# Altium PCB bldcDriverVer02.PcbDoc
Units mil, origin at the board's own origin, x right, y up, seen from the top; angles counter-clockwise.
Board outline 3346.46 x 3346.46 mil, 4 copper layers (Top Layer, Power Layer, Gnd Layer, Bottom Layer), stack 23.756 mil thick; 118 components, 64 nets, 350 pads, 111 vias.
Unrouted connection lines stored in the file: 2.
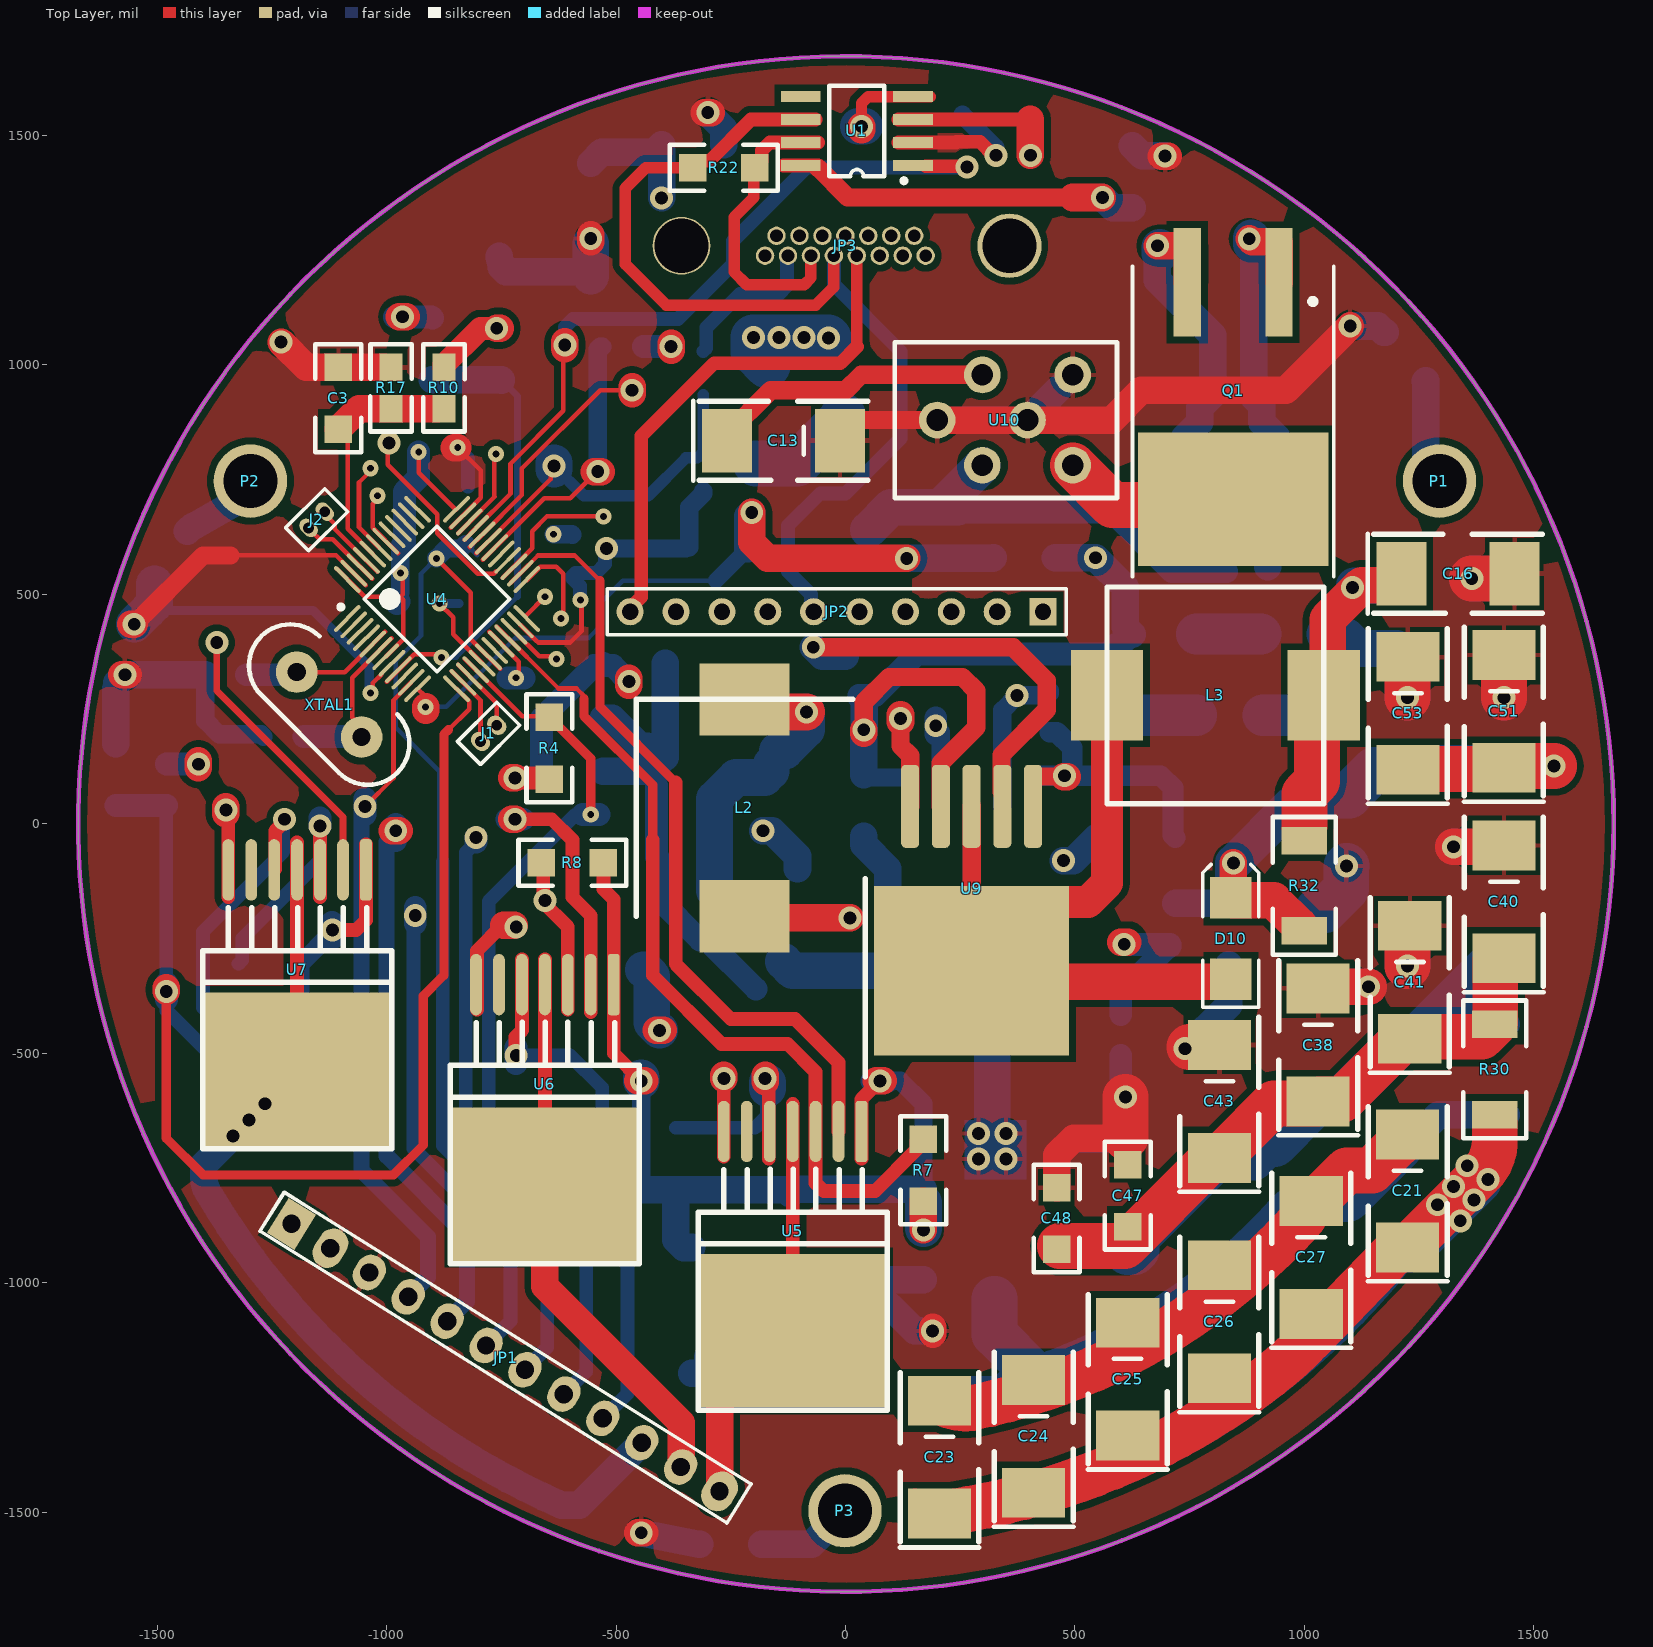
[diagram p0: Top Layer view]
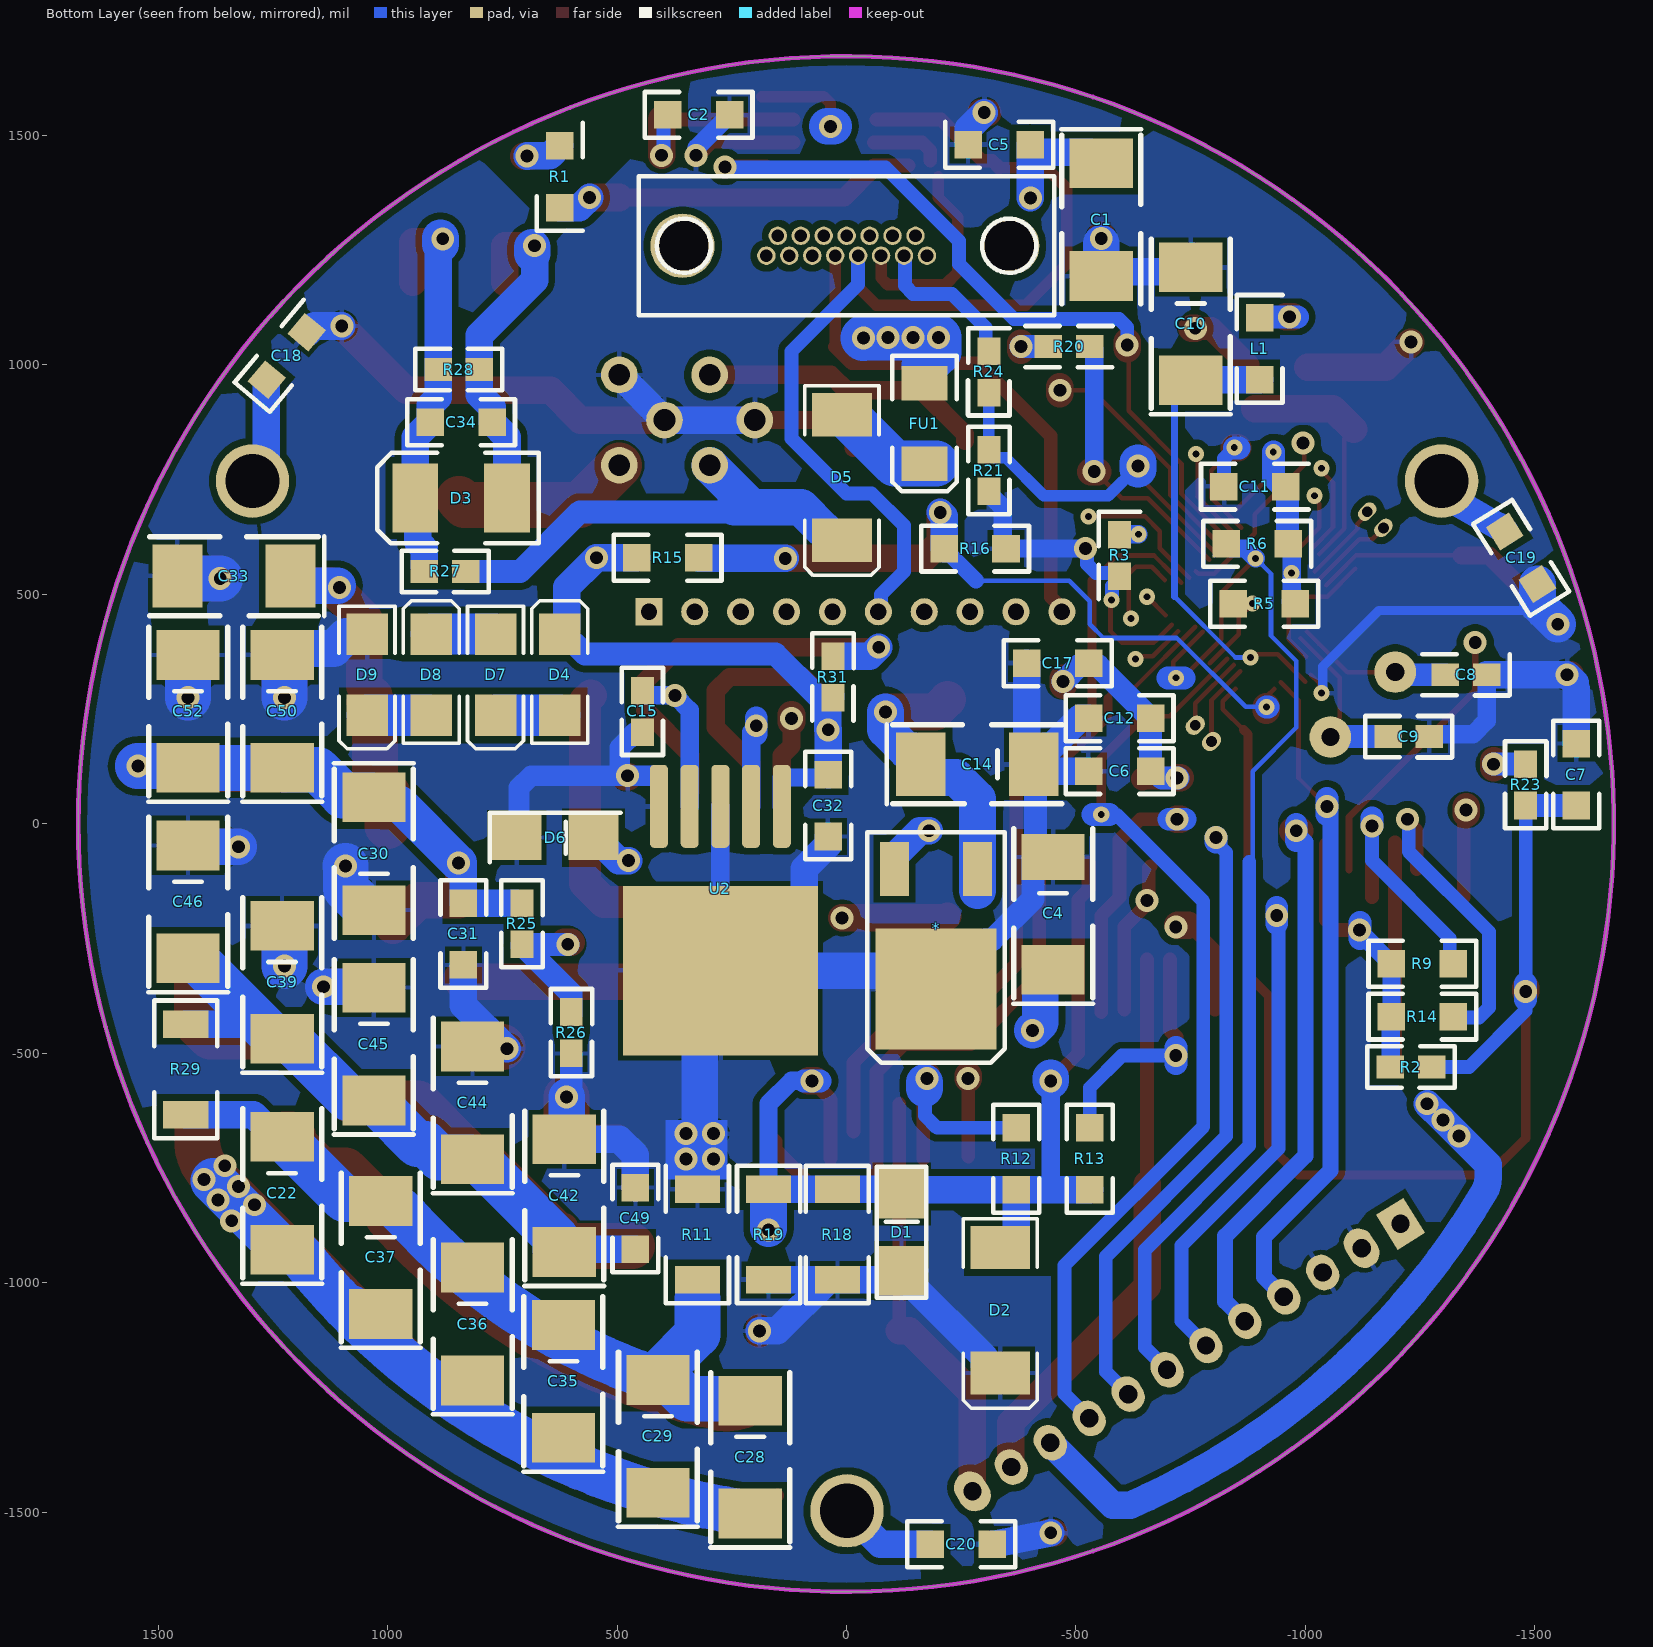
[diagram p1: Bottom Layer view, seen from below]
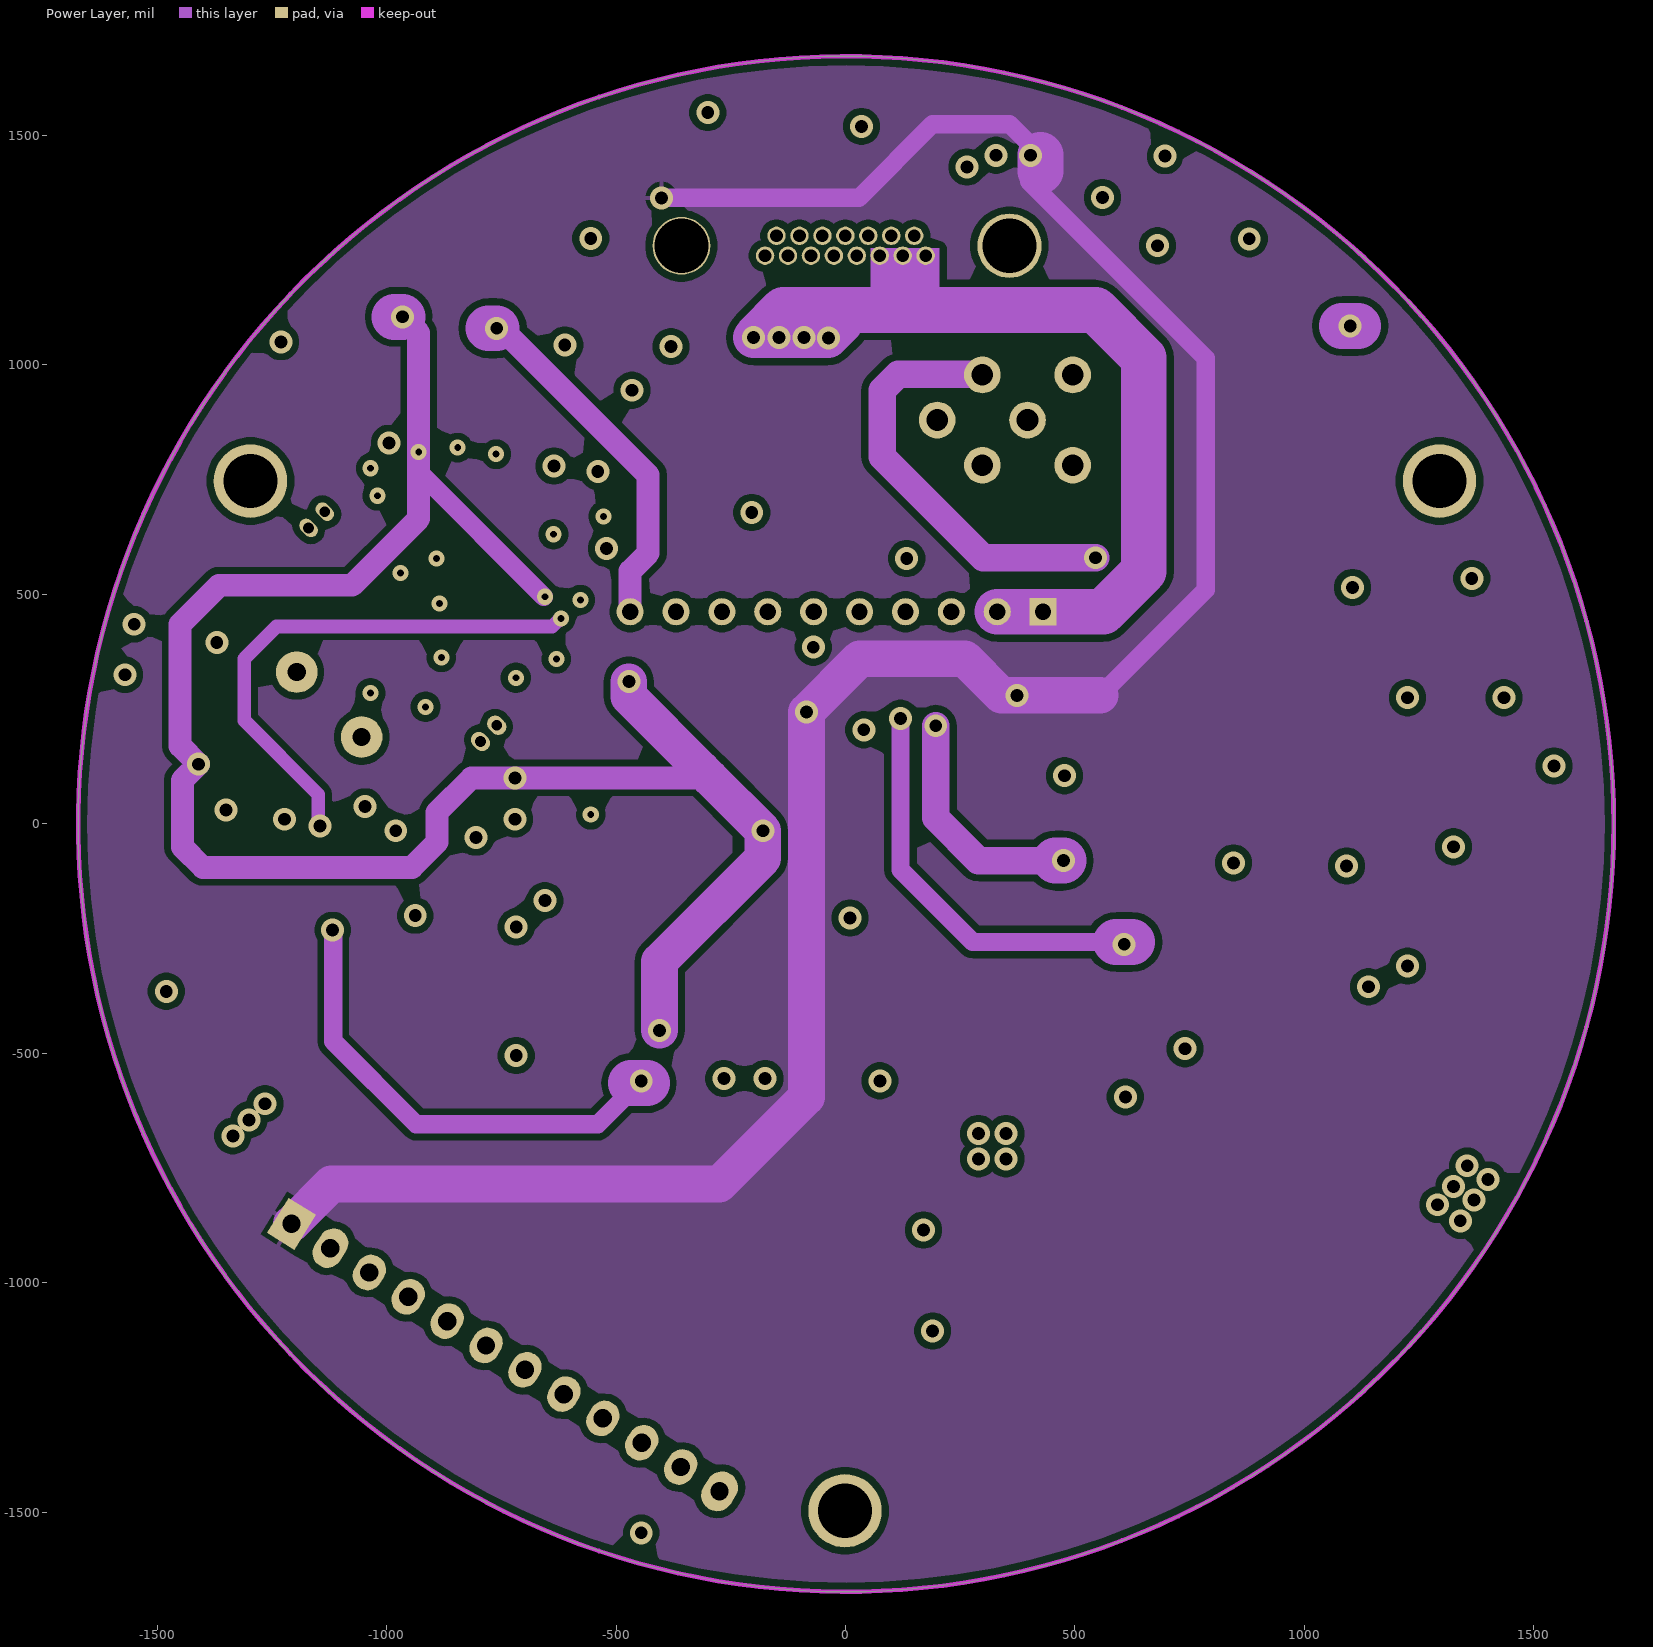
[diagram p2: Power Layer]
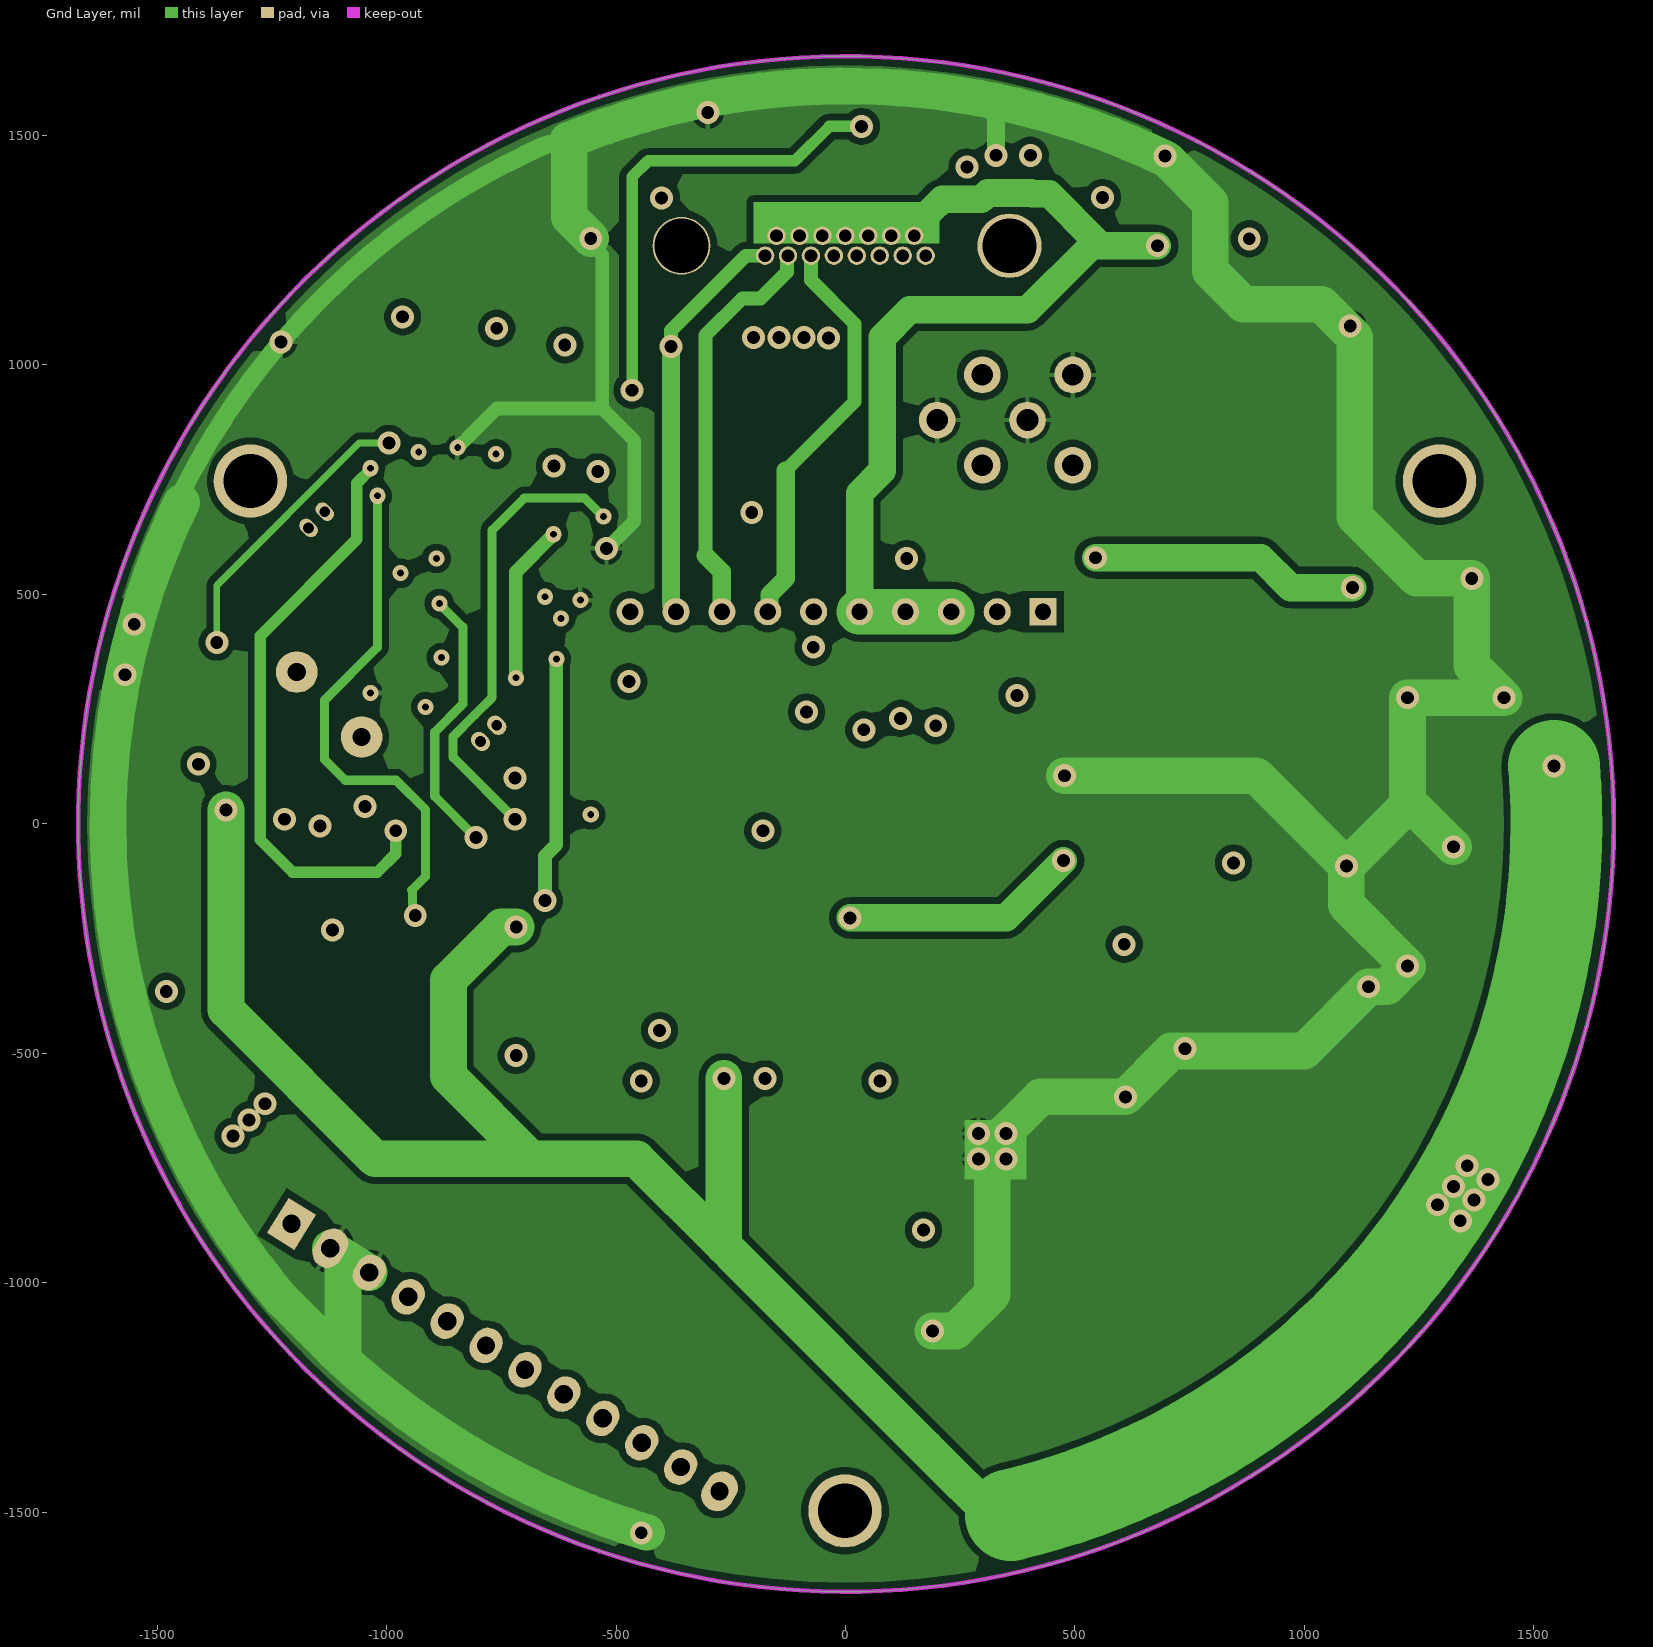
[diagram p3: Gnd Layer]

## Layer stack, top to bottom
Top Solder: solder mask 0.4, Solder Resist, Dk 3.5
Top Layer: signal copper 1.4
Dielectric 2: prepreg 2.8, PP-006, Dk 4.1
Power Layer: signal copper 1.378
Dielectric 1: dielectric 12.6, FR-4, Dk 4.8
Gnd Layer: signal copper 1.378
Dielectric 5: prepreg 2.8, PP-006, Dk 4.1
Bottom Layer: signal copper 1.4
Bottom Solder: solder mask 0.4, Solder Resist, Dk 3.5

## Board outline
-1672.01,-0.29 ccw(c1.22,-0.29) 1.22,-1673.52 ccw(c1.22,-0.29) 1674.45,-0.29 ccw(c1.22,-0.29) 1.22,1672.94 ccw(c1.22,-0.29)

## Design rules (kind name [scope] priority, off if disabled: settings)
Clearance Clearance_1 [All] p1: gap=15 ignorepadtopadclearanceinfootprint=TRUE
HoleSize [All] p1: absolutevalues=TRUE maxlimit=200 minlimit=1 maxpercent=80.000 minpercent=20.000
PolygonConnect [All] p1: connectstyle=Relief reliefconductorwidth=10 reliefentries=4 polygonreliefangle="90 Angle" airgapwidth=10
RoutingVias [All] p1: holewidth=28 width=50 viastyle="Through Hole" minholewidth=10 minwidth=20 maxholewidth=28 maxwidth=50
SolderMaskExpansion [All] p1: expansion=4 istentingtop=FALSE
Width [All] p1: maxlimit=200 minlimit=10 preferedwidth=100 toplayer_maxwidth=100 toplayer_prefwidth=30 midlayer1_prefwidth=60 bottomlayer_maxwidth=100 bottomlayer_prefwidth=30 minimp=50.000000 maximp=50.000000 favimp=50.000000
29 further rules are at their usual default settings.

## Classes and differential pairs
net class motor[3..1]: motor1 motor2 motor3
net class cntBridge[7..1]: cntBridge1 cntBridge2 cntBridge3 cntBridge4 cntBridge5 cntBridge6 cntBridge7
component class U_Supply: C13 C14 C15 C16 C18 C19 C20 C34 D3 D4 D5 D6 D7 D8 D9 FU1 L2 P1 P2 P3 Q1 R15 R16 R27 R28 U2 U10
component class U_FBridge: C21 C22 C23 C24 C25 C26 C27 C28 C29 C35 C36 C37 C38 C39 C40 C41 C42 C43 C44 C45 C46 C47 C48 C49 D1 D2 R7 R8 R9 R11 R12 R13 R14 R18 R19 R29 R30 U5 U6 U7
component class U_Control: * C3 C4 C5 C6 C7 C8 C9 C10 C11 C12 C17 J1 J2 L1 R2 R3 R4 R5 R6 R10 R17 R20 R21 R23 R24 U4 XTAL1
component class U_Communication: C1 C2 R1 R22 U1
component class Designator: C30 C31 C32 C33 C50 C51 C52 C53 D10 L3 R25 R26 R31 R32 U9
component class BLDC_Schem: JP1 JP2 JP3

## Components (designator, comment, footprint, x,y, rotation, side; value= is the part's Value field where it differs from the comment)
* "LF33" Dpak -345,-18 r0 bottom
C1 "100u_Tantalium" Tantalum_9545#1 -555,1316.97 r270 bottom
C2 "1u" 1206_SMD 322.5,1545 r180 bottom
C3 "1u" 1206_SMD -1105,927.5 r90 top
C4 "100u_Tantalium" Tantalum_9545#2 -450,-195 r90 bottom
C5 "1u" 1206_SMD -332.5,1480 r0 bottom
C6 "1u" 1206_SMD -595,115 r0 bottom
C7 "1u" 1206_SMD -1590,107.5 r90 bottom
C8 "22p" 0805 -1305,325 r180 bottom
C9 "22p" 0805 -1180,190 r180 bottom
C10 "10u_Tantalium" Tantalum_9545#1 -750,1090 r90 bottom
C11 "1u" 1206_SMD -890,735 r0 bottom
C12 "1u" 1206_SMD -595,230 r0 bottom
C13 "10u_Tantalium_35" Tantalum_9545#1 -135,835 r0 top
C14 "100u_Tantalium" Tantalum_9545#1 -285,130 r180 bottom
C15 "1u" 0805 445,290 r270 bottom
C16 "10u_Tantalium_35" Tantalum_9545#1 1335,545 r0 top
C17 "1u" 1206_SMD -460,350 r0 bottom
C18 "100nF" 1206_SMD 1220,1020 r130 bottom
C19 "100nF" 1206_SMD -1470,580 r238 bottom
C20 "100nF" 1206_SMD -250,-1570 r180 bottom
C21 "Cap" Tantalum_9545#1 1225,-800 r90 top value=160uF
C22 "Cap" Tantalum_9545#1 1230,-805 r90 bottom value=160uF
C23 "Cap" Tantalum_9545#1 205,-1380 r90 top value=160uF
C24 "Cap" Tantalum_9545#1 410,-1335 r90 top value=160uF
C25 "Cap" Tantalum_9545#1 615,-1210 r90 top value=160uF
C26 "Cap" Tantalum_9545#1 815,-1085 r90 top value=160uF
C27 "Cap" Tantalum_9545#1 1015,-945 r90 top value=160uF
C28 "Cap" Tantalum_9545#1 210,-1380 r90 bottom value=160uF
C29 "Cap" Tantalum_9545#1 411,-1335 r90 bottom value=160uF
C30 "Cap Pol1" Tantalum_9545#1 1030,-65 r270 bottom value=50uF
C31 "Cap Pol1" 1206_SMD 835,-240 r270 bottom value=100nf
C32 "Cap Pol1" 1206_SMD 40,40 r270 bottom value=100nF
C33 "Cap Pol1" Tantalum_9545#1 1335,540 r0 bottom value=50uF
C34 "Cap" 1206_SMD 840,875 r0 bottom value=100nF
C35 "Cap" Tantalum_9545#1 617,-1215 r90 bottom value=160uF
C36 "Cap" Tantalum_9545#1 815,-1090 r90 bottom value=160uF
C37 "Cap" Tantalum_9545#1 1015,-945 r90 bottom value=160uF
C38 "Cap" Tantalum_9545#1 1030,-481.97 r90 top value=160uF
C39 "Cap" Tantalum_9545#1 1230,-345 r90 bottom value=160uF
C40 "Cap" Tantalum_9545#1 1435,-170 r90 top value=160uF
C41 "Cap" Tantalum_9545#1 1230,-345 r90 top value=160uF
C42 "Cap" Tantalum_9545#1 615,-810 r90 bottom value=160uF
C43 "Cap" Tantalum_9545#1 815,-605 r90 top value=160uF
C44 "Cap" Tantalum_9545#1 815,-608.03 r90 bottom value=160uF
C45 "Cap" Tantalum_9545#1 1030,-480 r90 bottom value=160uF
C46 "Cap" Tantalum_9545#1 1435,-170 r90 bottom value=160uF
C47 "Cap" 1206_SMD 615,-810 r270 top value=100nF
C48 "Cap" 1206_SMD 460,-860 r270 top value=100nF
C49 "Cap" 1206_SMD 460,-860 r270 bottom value=100nF
C50 "Cap Pol1" Tantalum_9545#1 1230,245 r90 bottom value=50uF
C51 "Cap Pol1" Tantalum_9545#1 1435,245 r90 top value=50uF
C52 "Cap Pol1" Tantalum_9545#1 1435,245 r90 bottom value=50uF
C53 "Cap Pol1" Tantalum_9545#1 1225.87,240.87 r90 top value=50uF
D1 "SS34" SMA -120,-890 r270 bottom
D2 "S3M" SMC -335,-1060 r270 bottom
D3 "5.1v" "diode zener_smd" 840,710 r0 bottom
D4 "SMBJ9.0A" SMB 625,325 r90 bottom
D5 "SS34" SMC 10,755 r270 bottom
D6 "SS110" SMA 635,-30 r0 bottom
D7 "SMBJ9.0A" SMB 765,325 r270 bottom
D8 "SMBJ9.0A" SMB 905,325 r90 bottom
D9 "SMBJ9.0A" SMB 1045,325 r270 bottom
D10 "5822B" SMB 840,-250 r90 top
FU1 "2A" 7227 -170,960 r270 bottom
J1 "ExA" MHDR1X2#1 -795.36,179.64 r45 top
J2 "ExD" MHDR1X2#2 -1134.64,680.36 r225 top
JP1 "Motor and Sensors" HDR1X12 -1207.21,-871.72 r328 top
JP2 "Power and Com" HDR1X10 430.79,462.28 r180 top
JP3 "Micro_D15" Micro_D -0.21,1259.93 r0 top locked
L1 "10uH" 1206_SMD -900,1035 r270 bottom
L2 "330uH" inductor_12.3*12.3 -220,35 r270 top
L3 "Inductor" inductor_12.3*12.3 806.22,280 r180 top value=33uh
P1 "head1" PAD 1294.62,747.08 r0 top
P2 "head1" PAD -1296.64,747.08 r0 top
P3 "head1" PAD -1.01,-1497.02 r0 top
Q1 "IRF3710SPBF" D2PAK 945,1180 r180 top
R1 "1k" 1206_SMD 625,1410 r270 bottom
R2 "1k" 0805 -1185,-530 r180 bottom
R3 "3.3k" 0805 -595,540 r90 bottom
R4 "1.2k" 1206_SMD -645,165 r270 top
R5 "1.2k" 1206_SMD -910,480 r180 bottom
R6 "1.2k" 1206_SMD -895,610 r180 bottom
R7 "4.7k" 1206_SMD 170,-755 r270 top
R8 "4.7k" 1206_SMD -595,-85 r0 top
R9 "4.7k" 1206_SMD -1255,-305 r0 bottom
R10 "10k" 0805 -875,905 r90 top
R11 "Res1" 2010_smd 325,-895 r270 bottom value=0ohm
R12 "680" 1206_SMD -370,-730 r270 bottom
R13 "680" 1206_SMD -530,-730 r270 bottom
R14 "680" 1206_SMD -1255,-420 r0 bottom
R15 "15k" 1206_SMD 390,580 r0 bottom
R16 "1.2k" 1206_SMD -280,600 r0 bottom
R17 "1.2k" 0805 -990,995 r270 top
R18 "0.33" 2010_smd 20,-895 r90 bottom
R19 "0.33" 2010_smd 170,-895 r90 bottom
R20 "820" 0805 -440,1040 r180 bottom
R21 "3.3k" 0805 -310,725 r90 bottom
R22 "680" 1206_SMD -265,1430 r0 top
R23 "180k" 0805 -1480,40 r90 bottom
R24 "820" 0805 -310,1030 r270 bottom
R25 "Res1" 0805_smd 707.42,-217.7 r90 bottom value=1K
R26 "Res1" 0805_smd 600,-455 r90 bottom value=1K
R27 "Res1" 0805_smd 875,550 r180 bottom value=1K
R28 "Res1" 0805 800,990 r0 bottom value=1K
R29 "Res1" 2010_smd 1440,-535 r270 bottom value=0ohm
R30 "Res1" 2010_smd 1415,-535 r90 top value=0ohm
R31 "10K" 0805_smd 30,320 r90 bottom
R32 "0" 2010_smd 1000,-135 r270 top
U1 "MCP2551" SOIC8 25,1510 r90 top
U2 "LM2576_5v" TO263-5L#1 275,-140.87 r270 bottom
U4 "STM32F103_CBT" LQFP48 -890,490 r45 top
U5 "BTN8980" TO263_7 -115,-887.67 r270 top
U6 "BTN8980" TO263_7 -655,-567.67 r270 top
U7 "BTN8980" TO263_7 -1195,-317.67 r270 top
U9 "XL6009" TO263-5L#2 275,-140.87 r270 top
U10 "BNX002-1" BNX002-1 396.85,880 r180 top
XTAL1 "8M" xtal -1125,260 r135 top

## Footprints (in the part's own frame and the unit in brackets; to place one, negate y for a bottom-side part, rotate by r counter-clockwise, add the part's x,y. Pads: shape width x height; smd on the part's side, far side on the other; paste and mask are expansions set on the pad)
0805 [mil]
  rect 60x50 smd: 1(0,0) 2(90,0)
  silkscreen extent -50,-45 140,45
0805_smd [mil]
  rect 60x50 smd: 1(-45,0) 2(45,0)
  silkscreen extent -95,-45 95,45, body extent -57,-28 61,27, height 21
1206_SMD [mil]
  rect 60x60 smd: 1(-67.5,0) 2(67.5,0)
  silkscreen extent -117,-50 118,50, body extent -66,-34 66,34, height 33
2010_smd [mm]
  rect 1.524x2.5 smd: 1(-2.5,0) 2(2.5,0)
  silkscreen extent -3.81,-1.75 3.81,1.75, body extent -2.5,-1.25 2.5,1.25, height 0.6
7227 [mil]
  rect 75x100 smd: 1(0,0) 2(175,0)
  silkscreen extent -60,-70 235,70
BNX002-1 [mm]
  round 2.032 hole 1.2: 1(2.5,-2.5) 2(2.5,2.5) 3(-2.5,-2.5) 4(-2.5,2.5) 5(0,0) 6(5,0)
  silkscreen extent -4.95,-4.31 7.35,4.31
D2PAK [mm]
  rect 1.5x6 smd: 1(0,0) 3(5.08,0)
  rect 10.55x7.4 smd: 2(2.54,12)
  silkscreen extent -3.04,-0.9 8.12,16.3, body extent -2.54,-0.84 7.62,14.42, height 4.88
"diode zener_smd" [mil] "D?"
  rect 100x150 smd: A(-100,0) K(100,0)
  silkscreen extent -169,-98 183,98, body extent -112,-69 125,69, height 39
Dpak [mm]
  rect 1.6x3 smd: 1(1.51,2.037) 3(6.11,2.037)
  rect 6.7x6.7 smd: 2(3.81,8.687)
  silkscreen extent 0,0 7.62,12.78, body extent 0.49,1.71 7.03,11.65, height 2.41
HDR1X10 [mm] "Connector; Header; 10 Position"
  rect 1.5x1.5 hole 0.9: 1(0,0)
  round 1.5 hole 0.9: 2(2.54,0) 3(5.08,0) 4(7.62,0) 5(10.16,0) 6(12.7,0) 7(15.24,0) 8(17.78,0) 9(20.32,0) 10(22.86,0)
  silkscreen extent -1.27,-1.27 24.13,1.27
HDR1X12 [mil] "Connector; Header; 12 Position"
  rect 70x90 hole 40: 1(0,0)
  oval 65x90 hole 40: 2(100,0)
  oval 65x80 hole 40: 3(200,0) 4(300,0) 5(400,0) 6(500,0) 7(600,0) 8(700,0) 9(800,0) 10(900,0) 11(1000,0)
  oval 70x90 hole 40: 12(1100,0)
  silkscreen extent -50,-50 1150,50
inductor_12.3*12.3 [mm]
  rect 4x5 smd: 1(-6,0) 2(6,0)
  silkscreen extent -6,-6 6,6
LQFP48 [mm] "TSQFP, 48-Leads, Body 9.0x9.0mm (max), Pitch 0.50mm, IPC Medium Density"
  oval 2x0.22 smd: 1(-4.275,2.75) 2(-4.275,2.25) 3(-4.275,1.75) 4(-4.275,1.25) 5(-4.275,0.75) 6(-4.275,0.25) 7(-4.275,-0.25) 8(-4.275,-0.75) 9(-4.275,-1.25) 10(-4.275,-1.75) 11(-4.275,-2.25) 12(-4.275,-2.75) 25(4.275,-2.75) 26(4.275,-2.25) 27(4.275,-1.75) 28(4.275,-1.25) 29(4.275,-0.75) 30(4.275,-0.25) 31(4.275,0.25) 32(4.275,0.75) 33(4.275,1.25) 34(4.275,1.75) 35(4.275,2.25) 36(4.275,2.75)
  oval 0.22x2 smd: 13(-2.75,-4.275) 14(-2.25,-4.275) 15(-1.75,-4.275) 16(-1.25,-4.275) 17(-0.75,-4.275) 18(-0.25,-4.275) 19(0.25,-4.275) 20(0.75,-4.275) 21(1.25,-4.275) 22(1.75,-4.275) 23(2.25,-4.275) 24(2.75,-4.275) 37(2.75,4.275) 38(2.25,4.275) 39(1.75,4.275) 40(1.25,4.275) 41(0.75,4.275) 42(0.25,4.275) 43(-0.25,4.275) 44(-0.75,4.275) 45(-1.25,4.275) 46(-1.75,4.275) 47(-2.25,4.275) 48(-2.75,4.275)
  silkscreen extent -4.2,-2.85 2.85,3.57, body extent -3.5,-3.5 3.5,3.5, height 1.6
MHDR1X2#1 [mil] "Connector; Header; 2 Position"
  oval 35x45 hole 23.62: 1(0,0) 2(50,0)
  silkscreen extent -35,-35 85,35
MHDR1X2#2 [mil] "Connector; Header; 2 Position"
  oval 30x45 hole 23.62: 1(0,0) 2(50,0)
  silkscreen extent -35,-35 85,35
Micro_D [mm]
  round 1.02 hole 0.7: 1(-4.445,-0.55) 2(-3.175,-0.55) 3(-1.905,-0.55) 4(-0.635,-0.55) 5(0.635,-0.55) 6(1.905,-0.55) 7(3.175,-0.55) 8(4.445,-0.55) 9(-3.81,0.55) 10(-2.54,0.55) 11(-1.27,0.55) 12(0,0.55) 13(1.27,0.55) 14(2.54,0.55) 15(3.81,0.55)
PAD [mil]
  round 160 hole 118.11: 1(0,0)
SMA [mm]
  rect 2.75x2.5 smd: A(2.125,0) K(-2.125,0)
  silkscreen extent -3.62,-1.37 3.62,1.37
SMB [mm] "DO-214-AA/SMB; 2 C-Bend Leads; Body 5.3 x 3.6 mm, inc. leads (LxW)"
  rect 2.3x2.3 smd: 1(-2.25,0) 2(2.25,0)
  silkscreen extent -3.8,-1.55 4.1,1.55
SMC [mm] "DO-214-AB/SMC; 2 C-Bend Leads; Body 7.9 x 5.9 mm, inc. leads (LxW)"
  rect 2.4x3.3 smd: 1(-3.475,0) 2(3.475,0)
  silkscreen extent -5.07,-2.05 5.43,2.05
SOIC8 [mm] "Small Outline; 8 Leads; Body Width 3.9 mm; Pitch 1.27 mm"
  rect 0.6x2.2 smd: 1(-1.905,-3.108) 2(-0.635,-3.108) 3(0.635,-3.108) 4(1.905,-3.108) 5(1.905,3.108) 6(0.635,3.108) 7(-0.635,3.108) 8(-1.905,3.108)
  silkscreen extent -2.88,-2.72 2.5,1.52, body extent -2.5,-3.1 2.5,3.1, height 1.75
Tantalum_9545#1 [mm]
  rect 2.75x3.5 smd: 1(-3.125,0) 2(3.125,0)
  silkscreen extent -5,-2.21 4.67,2.21
Tantalum_9545#2 [mm]
  rect 2.75x3.5 smd: 1(-3.125,0)
  rect 2.54x3.5 smd: 2(3.125,0)
  silkscreen extent -5,-2.21 4.67,2.21
TO263-5L#1 [mm]
  rrect50% 4.6x1 smd: 1(-4.55,3.4) 2(-4.55,1.7) 3(-4.55,0) 4(-4.55,-1.7) 5(-4.55,-3.4)
  rect 9.4x10.8 smd: 6(4.55,0)
TO263-5L#2 [mm]
  rrect50% 4.6x1 smd: 1(-4.55,3.4) 2(-4.55,1.7) 3(-4.55,0) 4(-4.55,-1.7) 5(-4.55,-3.4)
  rect 9.4x10.8 smd: 3(4.55,0)
  silkscreen extent -0.55,-5.9 10.42,-5.9
TO263_7 [mm]
  rrect50% 3.4x0.65 smd: 1(-5.52,3.81)
  oval 3.4x0.65 smd: 2(-5.52,2.54) 3(-5.52,1.27) 4(-5.52,0) 5(-5.52,-1.27) 6(-5.52,-2.54) 7(-5.52,-3.81)
  rect 8.5x10.4 smd mask+0.076: 8(5.52,0)
  silkscreen extent -3.44,-5.23 9.92,5.23
xtal [mm]
  round 2.3 hole 1: 1(2.54,0) 2(-2.54,0)
  silkscreen extent -5.33,-2.29 5.33,2.29

## Part data
C1 C4 C10 C13 C14 C16 C18 C19 C20: library part CAP_ELECTRO
C2 C3 C5 C6 C7 C8 C9 C11 C12 C15 C17: library part CAP, "Capacitor"
C21 C22 C23 C24 C25 C26 C27 C28 C29 C34 C35 C36 C37 C38 C39 C40 C41 C42 C43 C44 C45 C46 C47 C48 C49: "Capacitor", LatestRevisionDate=17-Jul-2002, LatestRevisionNote="Re-released for DXP Platform.", PackageDescription="Radial Cap, Thru-Hole; 2 Leads; 0.3 in Pin Spacing", PackageReference=RAD-0.3, Published=8-Jun-2000, Publisher="Altium Limited"
C30 C31 C32 C33 C50 C51 C52 C53: "Polarized Capacitor (Radial)", LatestRevisionDate=17-Jul-2002, LatestRevisionNote="Re-released for DXP Platform.", PackageDescription="Polarized Capacitor (Radial); 2 Leads", PackageReference=RB7.6-15, Published=8-Jun-2000, Publisher="Altium Limited"
D1 D2: library part DIODE
D3: library part "D Zener", "Zener Diode", LatestRevisionDate=17-Jul-2002, LatestRevisionNote="Re-released for DXP Platform.", PackageDescription="Diode, Thru-Hole; 2 Leads; 0.7 in Pin Spacing", PackageReference=DIODE-0.7, Published=8-Jun-2000, Publisher="Altium Limited"
D4 D7 D8 D9: library part ZENER
D5 D6: library part DIODE_SCH
D10: library part Diode, "Default Diode", Code_JEDEC=DO-214-AB, LatestRevisionDate=17-Jul-2002, LatestRevisionNote="Re-released for DXP Platform.", PackageDescription="DO-214-AB/SMC; 2 C-Bend Leads; Body 7.9 x 5.9 mm, inc. leads (LxW)", PackageReference=SMC, PackageVersion=Sep-1996, Published=8-Jun-2000, Publisher="Altium Limited"
FU1: library part FUSE2, "Fuse"
J1 J2: library part "HEADER 2"
JP1: library part "HEADER 12"
JP2: library part "HEADER 10"
JP3: library part "HEADER 15"
L1 L2: library part INDUCTOR
Q1: library part NMOS-2, "N-Channel Power MOSFET", ComponentLink1Description="Manufacturer Link", ComponentLink1URL=http://www.irf.com/, DatasheetVersion=PD-9.814, LatestRevisionDate=17-Jul-2002, LatestRevisionNote="Re-released for DXP Platform.", Note="Pin 2 is electrically connected to pin 4.", PackageDescription="TO, Thru-Hole, Vertical, Heatsink Mounted; 3 In-Line Leads; Pitch 2.54 mm", PackageReference=TO-220AB, PackageVersion=Feb-1997, Published=8-Jun-2000, Publisher="Altium Limited"
R1 R2 R3 R4 R5 R6 R7 R8 R9 R10 R12 R13 R14 R15 R16 R17 R18 R19 R20 R21 R22 R23 R24: library part RES2
R11 R25 R26 R27 R28 R29 R30: "Resistor", LatestRevisionDate=17-Jul-2002, LatestRevisionNote="Re-released for DXP Platform.", PackageDescription="Axial Device, Thru-Hole; 2 Leads; 0.3 in Pin Spacing", PackageReference=AXIAL-0.3, Published=8-Jun-2000, Publisher="Altium Limited"
R31 R32: library part Res1, "Resistor", LatestRevisionDate=17-Jul-2002, LatestRevisionNote="Re-released for DXP Platform.", PackageDescription="Axial Device, Thru-Hole; 2 Leads; 0.3 in Pin Spacing", PackageReference=AXIAL-0.3, Published=8-Jun-2000, Publisher="Altium Limited"
U1: library part CAN_Interface
U4: "ST Microcontroller"
U9: "Voltage Booster"
U10: "EMI FILTERS"
XTAL1: library part CRYSTAL, "Crystal"
L3: Code_IEC=1005, Code_JEITA=0402, LatestRevisionDate=29-May-2009, LatestRevisionNote="IPC-7351 Footprint Added.", PackageDescription="Chip Inductor", PackageReference=0402-A, Published=8-Jun-2000, Publisher="Altium Limited"

## Free pads (board coordinates)
  round 125.98 hole 118.11: 0(-357.47,1259.84)
  round 140 hole 118.11: 0(357.49,1259.84)

## Via types
v1: diameter 50, hole 28, Top Layer to Bottom Layer, 92 vias
v2: diameter 35, hole 15, Top Layer to Bottom Layer, 19 vias

## Nets (pads, with @x,y where several pads share a name; then routed paths per layer and width w, separated by ;. In a path a pad name is that pad's centre, name@x,y a point inside that pad or via, vN(x,y) a via of type N, cw(c..) or ccw(c..) an arc to the next point about the centre after c; other vN are vias at no path point)
BodyGnd1: C18.1 P1.1 | length 232.1
  Bottom Layer w60: C18.1@1264.45,965.82 1263.39,964.76 1265,963.14 1265,776.7 P1.1
BodyGnd2: C19.1 P2.1 | length 182.9
  Bottom Layer w60: C19.1 -1434.17,637.45 -1431.8,639.82 -1426.09,645.53 -1419.08,649.53 -1318.02,707.1 -1312.31,712.81 -1303.67,721.45 -1302.5,725.71 P2.1
BodyGnd3: C20.1 P3.1 | length 211.7
  Bottom Layer w60: C20.1 -73.99,-1570 P3.1
cntBridge1: U4.26 U5.2 | length 1739.9
  Top Layer w10: U4.26@-729.66,525.07 U4.26 -669.91,584.82 -589.82,584.82 -535,530
  Top Layer w20: -535,530 -535,255 -370,90
  Top Layer w30: -370,90 -370,-305 -250,-425 -110,-425 -15,-520 U5.2
cntBridge2: U4.27 U6.2 | length 1884
  Top Layer w10: U4.27@-746.76,536.76 -682.5,601.01 -682.5,637.85 -650.35,670 -527.18,670 v2(-526.96,670.22)
  Top Layer w30: v1(-720,10) -640,10 -595,-35 -595,-160 -555,-200 U6.2 U6.2@-555,-410
  Top Layer w60: v1@-727.5,10 v1(-720,10)
  Gnd Layer w20: v1(-720,10) -855,145 -855,190 -853.19,191.81 -853.19,192.07 -807.78,237.48 -770,275.27 -770,640 -700,710 -568.49,710 -528.71,670.22 v2(-526.96,670.22)
  Bottom Layer w50: v1@-737.5,10 v1(-720,10) v1@-702.5,10
cntBridge3: U4.28 U7.2 | length 1647.7
  Top Layer w10: v1(-995,830) -997.5,827.5 -997.5,782.5 -889.65,674.65 -889.65,633.04 -801.61,545 -766.35,545 U4.28@-760.97,550.38
  Top Layer w15: v1(-1370,395) -1370,290 -1095,15 U7.2
  Gnd Layer w15: v1(-1370,395) -1370,520 -1060,830 v1(-995,830)
cntBridge4: R7.1 U4.21 U5.3 | length 1913.6
  Top Layer w10: U4.21@-760.2,429.8 -625.4,295 -586,295 -566.9,275.9 -570,272.8
  Top Layer w20: -570,272.8 -570,235 -420,85 -420,-35
  Top Layer w30: -420,-35 -420,-330 -270,-480 -125.71,-480 -65,-540.71 U5.3 -65,-782.43 -47.43,-800 65,-800 155,-710 155,-692.5 R7.1@170,-677.5
cntBridge5: R8.1 U4.22 U6.3 | length 1001.2
  Top Layer w10: U4.22 -667.5,364.94 -635.24,364.94 v2(-630,359.7)
  Top Layer w15: R8.1@-662.5,-92.5 R8.1
  Top Layer w30: v1@-662.5,-167.5 -605,-225 U6.3 U6.3@-605,-405 ; R8.1@-662.5,-92.5 -658.75,-96.25 -658.75,-163.53 v1(-655,-167.28)
  Gnd Layer w30: v1(-655,-167.28) -655,-70 -630,-45 v2(-630,359.7)
cntBridge6: R9.1 U4.25 U7.3 | length 1901.5
  Top Layer w10: U4.25@-693.49,531.51 -665,560 -630,560 -615.22,545.22 -615.22,452.28 v2(-620,447.5)
  Top Layer w30: U7.3@-1145,-160 U7.3 v1(-1145,-5)
  Power Layer w30: v1(-1145,-5) -1148.83,-1.17 -1148.83,63.83 -1310,225 -1310,360 -1240,430 -638.85,430 -621.35,447.5 v2(-620,447.5)
  Bottom Layer w30: R9.1 -1314.43,-296.93 -1314.43,-249.43 -1145,-80 v1(-1145,-5)
  Bottom Layer w50: v1(-1145,-5) v1@-1145,12.5
cntBridge7: D1.K D2.1 R2.1 R7.2 R8.2 R9.2 R12.2 R13.2 R14.2 R18.2 R19.2 U5.1 U6.1 U7.1 | length 4041.5
  Top Layer w30: v1(-1117.5,-231.17) -1066.17,-231.17 -1045,-210 U7.1 U7.1@-1045,-45 ; R8.2 -527.5,-142.5 -505,-165 U6.1 -505,-500 v1(-445,-560) ; U5.1@35,-730 U5.1 35,-600 v1(75,-560)
  Top Layer w60: v1@-452.5,-560 v1(-445,-560) v1@-437.5,-560 ; v1@67.5,-560 v1(75,-560) v1@82.5,-560 ; v1(170,-885) R7.2
  Power Layer w40: v1(-1117.5,-231.17) -1116.17,-232.5 -1116.17,-473.83 -935,-655 -540,-655 -450,-565 v1(-445,-560)
  Power Layer w100: v1@-467.5,-565 -450,-565 v1@-432.5,-565
  Bottom Layer w40: R2.1 -1186.25,-528.75 -1186.25,-421.25 R14.2 R9.2 -1119.41,-236.91 -1119.41,-233.09 v1(-1117.5,-231.17) ; -452.5,-797.5 -445,-790 -445,-566.91 v1(-445,-560) ; v1(75,-560) 120,-560 170,-610 R19.2 170,-881.91 v1(170,-885)
  Bottom Layer w50: v1@-1118.46,-249.63 v1@-1118.46,-214.63 ; v1@57.5,-560 v1@92.5,-560
  Bottom Layer w60: R13.2 -452.5,-797.5 R12.2@-375,-797.5 ; D2.1 -352.72,-923.19 -369.96,-905.94 R12.2 R12.2 -128.84,-797.5 D1.K ; D1.K@-120,-796.57 R18.2 R19.2
  Bottom Layer w80: v1(-445,-560) v1@-445,-553.09 ; v1@170,-881.91 R19.2@170,-825
GND: *.2 C1.2 C2.2 C3.2 C4.2 C5.2 C6.2 C7.2 C8.2 C9.2 C10.2 C11.2 C12.2 C13.2 C14.2 C15.2 C16.2 C17.2 C18.2 C19.2 C20.2 C30.2 C31.2 C32.2 C33.2 C38.2 C39.2 C40.2 C41.2 C42.2 C43.2 C44.2 C45.2 C46.2 C47.1 C48.1 C49.1 C50.2 C51.2 C52.2 C53.2 D1.A D2.2 D6.A D9.1 JP1.2 JP1.3 R1.1 R3.1 R11.1 R16.1 R17.1 R18.1 R19.1 R21.1 R26.1 U1.2 U2.3 U2.5 U2.6 U4.8 U4.23 U4.35 U4.47 U9.1 U10.3 U10.5 U10.6 | length 24595.7
  Top Layer w10: -1340,585 -1110.27,585 U4.47 ; U4.47@-1071.51,546.51 U4.47@-1045,520 ; v2(-1035,285) -1030.22,289.78 -1030.22,307.08 U4.8@-1011.96,325.33 ; U4.35@-860.14,645.14 U4.35 -795,710.27 -795,770 v2(-845,820) ; U4.23 -672.84,398.11 -669.68,395.4 -669.46,395.18 -599.64,395.18 -575.26,419.56 -575.26,485.92 v2(-577.5,488.16) ; v1@-559.13,1280 v1(-555,1275.87)
  Top Layer w30: U1.2@115,1485 U1.2 240.81,1485 242.22,1486.41 293.18,1486.41 322.63,1456.96 v1(328.04,1456.96)
  Top Layer w40: v1(-1550,435) -1400,585 -1340,585 ; C13.2@-15,820 -15,842.84 22.16,880 U10.6 ; U9.1@413.86,99.17 417.77,103.09 475.65,103.09 v1(477.56,105)
  Top Layer w60: v1@-1577.5,325 v1(-1570,325) v1@-1562.5,325 ; v1@-1557.5,435 v1(-1550,435) ; v1(-1230,1050) -1175,995 C3.2 R17.1@-1005,995 ; v2@-852.5,820 v2(-845,820) ; v1@-555,1268.37 v1(-555,1275.87) v1@-555,1283.37 ; v1@-452.5,-1545 v1(-445,-1545) v1@-437.5,-1545 ; v1@-307.5,1550 v1(-300,1550) v1@-292.5,1550 ; v1@190,-1112.5 v1(190,-1105) v1@190,-1097.5 ; U10.6 U10.5 580,880 645,945 960,945 v1(1100,1085) ; C48.1 460,-722.53 497.53,-685 613.03,-685 615,-686.97 ; v1@475.65,103.09 v1@483.15,103.09 ; v1@688.81,1455.27 v1(696.31,1455.27) v1@703.81,1455.27
  Top Layer w80: C38.2 1033.94,-355 v1(1140,-355) ; v1(1325,-50) 1431.97,-50 C40.2
  Top Layer w100: 610,-682.84 v1(610,-595) ; C43.2@750,-486.1 810.87,-486.1 C43.2 ; v1(1225,-310) 1225,-226.1 1229.13,-221.97 C41.2 ; v1(1225,275) 1225,363.03 C53.2 ; v1(1365,535) 1453.9,535 1458.03,539.13 C16.2 ; v1(1435,275) C51.2
  Power Layer w100: v1@1082.5,1085 v1(1100,1085) v1@1117.5,1085
  Gnd Layer w30: v2(-845,820) -760,905 -530,905 ; v1(-555,1275.87) -555,1270.45 -545,1260.45 -545,1255 -530,1240 -530,905 ; v1(-520.79,600) -520,600 -460,660 -460,835 -530,905
  Gnd Layer w40: -1446.24,700.6 cw(c-1386.71,708.04) -1440.27,735.07 cw(c1.24,-0.32) -659.17,1477.05 cw(c-634.74,1422.25) -624.25,1481.32 ; 289,1581.98 328.04,1542.94 v1(328.04,1456.96)
  Gnd Layer w80: -1446.24,700.6 ccw(c1.22,-0.29) -1528.03,497.5 ccw(c1.22,-0.29) -1231.88,-1032.7 -1227.21,-1037.79 -1113.37,-1151.26 ccw(c68.15,109.47) -1095,-1168.23 ; JP1.3 -1120,-926.21 JP1.2 -1095,-952.11 -1095,-1168.23 ; -604.76,1489.4 cw(c1.22,-0.27) 289,1581.98 cw(c1.22,-0.29) 699.29,1448.53 795,1352.82 795,1205 867.5,1132.5 1037.5,1132.5 1110,1060 1110,670 1245,535 v1(1365,535) 1365,345 v1(1435,275) v1(1225,275) 1225,50 ; -601.86,1482.04 -601.86,1322.73 v1(-555,1275.87) ; v1@-433.19,-1544.04 cw(c68.15,109.47) -1095,-1168.23 ; v1(190,-1105) 240,-1105 320,-1025 320,-742.5 cw(c327.5,-742.5) 327.5,-735 332.5,-730 v1(350,-730) ; v1@327.5,-722.5 337.5,-722.5 350,-710 v1(350,-675) 350,-670 425,-595 v1(610,-595) 710,-495 1000,-495 v1(1140,-355) 1180,-355 v1(1225,-310) 1091.31,-176.31 1091.31,-93.2 1225,40.49 1225,50 ; v1(477.56,105) 895.19,105 v1(1092.15,-91.96) ; v1(1325,-50) 1225,50
  Bottom Layer w20: -1520,465 -1160,465 -1037.87,342.87 -1037.87,288.73 v2@-1035,285.86
  Bottom Layer w30: v2(-845,820) -845,818.65 -822.5,796.15 C11.2 ; v2@-577.5,489.51 -578.46,490.47 -578.46,518.46 -595,535 R3.1 -588.18,546.82 -543.18,546.82 -523.83,566.17 -523.83,596.96 v1(-520.79,600)
  Bottom Layer w40: C8.2 -1395,225 -1365,195 -1273.09,195 C9.2@-1268.09,190 ; v1(-520.79,600) R16.1 ; R16.1@-340,602.5 -340,690 -310,720 R21.1 ; C2.2 326.13,1473.87 326.13,1458.87 v1(328.04,1456.96) ; U2.6 U2.3
  Bottom Layer w45: U2.5@415,105 v1(477.56,105) v1@493.65,105 ; C15.2 460,200 494.04,165.96 494.04,105.96 495,105 687.38,105 713.74,78.64 713.74,-25.08 D6.A
  Bottom Layer w50: v2@-855,818.65 v2@-845,818.65 ; C14.2@-411.67,83.6 -411.67,-71.97 -406.53,-77.11 -406.53,-163.47 -316.89,-253.11 -301.89,-253.11 *.2 ; R26.1@600,-505 600,-585 v1(610,-595)
  Bottom Layer w60: C7.2 -1590,294.13 -1587.46,307.54 v1(-1570,325) C8.2 ; C10.2@-754.73,1237.16 C10.2 -740.45,1203.48 -564.55,1203.48 C1.2 ; C6.2 -423.03,115 C14.2 -407.5,130.53 C14.2@-407.5,168.9 ; C12.2 -508.03,230 -446.93,168.9 -432.16,168.9 C14.2@-408.03,144.76 ; v1(-445,-1545) C20.2 ; C14.2@-392.5,145.53 C17.2 ; D2.2 -317.28,-1196.81 -300.04,-1179.57 -300.04,-1161.85 -139.21,-1001.02 -139.21,-992.87 D1.A ; v1(-300,1550) -265,1515 C5.2 ; D1.A@-120,-993.43 R18.1 ; C32.2 40,-35 40,-45 92.4,-97.4 92.4,-164.96 247.44,-320 U2.6 ; R19.1 39.21,-993.43 150.79,-1105 v1(190,-1105) ; U10.6 U10.5 U10.3 ; C49.1 460,-722.12 495.15,-686.97 C42.2 ; R1.1 646.38,1456.11 695.47,1456.11 v1(696.31,1455.27) ; v1(740,-490) 835,-395 C31.2 ; v1(1100,1085) 1159.78,1085 1173.08,1071.71 C18.2
  Bottom Layer w80: v1(-1550,435) -1520,465 -1505.77,479.23 C19.2 ; C1.2 v1@-555,1265 ; *.2@-135,-300 -115,-320 U2.6@247.44,-320 ; U2.6 320,-365 320,-660 ; v1(610,-595) 610,-681.97 C42.2 ; C45.2 1031.97,-355 v1(1140,-355) ; D9.1 1050.28,408.31 1091.69,408.31 1117.84,382.16 1201.1,382.16 1220.24,363.03 C50.2@1225,363.03 ; v1(1325,-50) 1431.97,-50 C46.2
  Bottom Layer w100: C30.2 1044.76,-188.03 1091.31,-141.48 1091.31,-92.79 v1(1092.15,-91.96) ; v1(1225,-310) 1225,-226.1 1229.13,-221.97 C39.2 ; v1(1225,275) 1225,363.03 1225,363.9 1229.13,368.03 C50.2 ; v1(1365,535) 1453.9,535 1458.03,539.13 C33.2 ; v1(1435,275) C52.2
  other v1: 290,-730 290,-675
motor1: JP1.12 U5.4 U5.8 | length 923.5
  Top Layer w30: U5.8 U5.4 U5.4@-115,-610
  Top Layer w60: JP1.12 -274.35,-1242.32 -137.03,-1105 U5.8
motor2: JP1.11 U6.4 U6.8 | length 1231.7
  Top Layer w30: U6.8 U6.4 U6.4@-655,-295
  Top Layer w60: U6.8 -655,-1007.76 -357.49,-1305.27 -357.49,-1389.43 -356.14,-1390.78 -356.14,-1398.62 JP1.11
motor3: JP1.10 U7.4 U7.8 | length 2071
  Top Layer w30: v1(-1300,-645) v1(-1265,-610) ; U7.8 U7.4 U7.4@-1195,-40
  Bottom Layer w60: v1(-1265,-610) v1(-1300,-645) v1(-1335,-680) -1398.22,-743.22 -1398.22,-771.33 ccw(c-1338.22,-771.14) -1389.96,-801.52 ccw(c61.36,60.02) -617.92,-1485.02 -605.2,-1485.02 -580.34,-1485.02 JP1.10
NetC3_1: C3.1 R10.1 R17.2 U4.44 | length 536.6
  Top Layer w10: C3.1 -1085,840 -1085,643.24 U4.44
  Top Layer w60: C3.1 -1060,905 R17.2 R10.1@-890,905
NetC7_1: C7.1 R2.2 R23.1 U4.13 | length 2842.8
  Top Layer w10: -865,205 -820,250 -820,266.89 U4.13
  Top Layer w20: v1(-1480,-365) -1480,-685 -1400,-765 -985,-765 -920,-700 -920,-375 -875,-330 -875,195 -865,205
  Top Layer w60: v1(-1480,-365) v1@-1480,-357.5
  Bottom Layer w30: R23.1 -1480,-407.09 -1357.09,-530 R2.2
  Bottom Layer w50: C7.1 R23.1 ; v1@-1480,-382.5 v1@-1480,-347.5
NetC8_1: C8.1 U4.5 XTAL1.1 | length 363.2
  Top Layer w10: XTAL1.1 -1091.05,330.71 U4.5 U4.5@-1003.38,418.38
  Top Layer w15: XTAL1.1 XTAL1.1@-1181.97,320.88 ; XTAL1.1@-1178.06,318.07 XTAL1.1@-1172.01,318.07
  Bottom Layer w50: C8.1 XTAL1.1@-1201.42,325
  Bottom Layer w60: XTAL1.1@-1201.42,325 XTAL1.1
NetC9_1: C9.1 U4.6 XTAL1.2 | length 385.1
  Top Layer w10: XTAL1.2 -1054.29,211.09 -1075,231.8 -1075,318.47 -1015.75,377.73 U4.6@-989.24,404.24
  Bottom Layer w50: C9.1 -1055,190 XTAL1.2
NetC10_1: C10.1 L1.2 U4.9 | length 1004
  Top Layer w10: U4.9@-999.51,310 -939.51,370 -894.89,370 -887.39,362.5 v2(-880.62,362.5)
  Bottom Layer w10: v2(-880.62,362.5) -847.5,362.5 -715,495
  Bottom Layer w15: C10.1 -715,931.97 -715,495
  Bottom Layer w60: L1.2 -750.53,967.5 C10.1
NetC13_1: C13.1 C16.1 C32.1 C33.1 D4.2 L3.1 R15.2 R31.1 R32.1 U2.1 U9.4 U10.1 | length 4818.6
  Top Layer w40: C13.1 -258.03,849.76 -162.79,945 0.71,945 34.14,978.43 U10.1 ; v1(40,205) 40,265 95,320 255,320 285,290 285,210 207.76,132.76 207.76,38.58 U9.4
  Top Layer w60: v1@40,197.5 v1(40,205) ; C16.1@1187.84,520 1211.97,544.13 C16.1
  Top Layer w80: L3.1@1030,280 1050.94,300.94 1050.94,445.94 1125,520 C16.1@1187.84,520
  Top Layer w100: 1000,-5 1000,65 1027.85,92.85 1027.85,253.17 L3.1@1040,265.32
  Power Layer w60: U10.1 296.85,980 115.15,980 80,944.85 80,800 300,580 v1(545,580)
  Gnd Layer w60: v1(545,580) 905,580 970,515 v1(1105,515)
  Bottom Layer w40: C32.1@46.55,100.95 140.83,100.95 141.14,100.63 U2.1
  Bottom Layer w50: R31.1 30,280 65,280 155,370 570,370 593.31,393.31 604.72,393.31 D4.2
  Bottom Layer w60: C32.1 v1(40,205) ; v1@40.98,205.98 R31.1@40.98,270 ; R15.2 v1(545,580) 609.72,515.28 609.72,428.86 D4.2
  Bottom Layer w80: v1@1108.86,518.86 1197.84,518.86 1211.97,532.99 C33.1
NetC21_1: C21.1 C22.1 C23.1 C24.1 C25.1 C26.1 C27.1 C28.1 C29.1 C30.1 C31.1 C35.1 C36.1 C37.1 C50.1 C51.1 C52.1 C53.1 D10.2 R25.2 R30.1 R32.2 U5.7 U6.7 U7.7 | length 11092.1
  Top Layer w30: v1(-1350,30) -1350,24.59 -1345,19.59 U7.7 U7.7@-1345,-160 ; U6.7@-802.8,-405 -802.8,-276.41 -747.03,-220.64 -744.36,-220.64 -743.94,-221.06 -721.33,-221.06 v1(-717.5,-224.89) ; U5.7@-265,-725 U5.7 v1(-265,-555) ; C23.1@151.1,-1463.9 190.24,-1503.03 C23.1
  Top Layer w60: v1@-1350,22.5 v1@-1350,24.59 ; v1(-1350,30) v1@-1350,37.5 ; -744.36,-220.64 -721.75,-220.64 v1@-721.33,-221.06 ; v1(-265,-555) v1@-265,-547.5 ; D10.2@845,-128.28 v1@845,-85
  Top Layer w80: D10.2 845.28,-166.69 933.27,-166.69 R32.2@988.29,-221.71
  Top Layer w100: C23.1@228.1,-1499.7 ccw(c0,0) 691.83,-1350 ccw(c0,0) 819.19,-1276.74 ccw(c0,0) 901.51,-1220 ccw(c362.14,-490.07) 1014.28,-1121.28 1041.24,-1093.43 1048.26,-1086.18 C21.1@1194.3,-935.29 ; C21.1 1385.71,-762.32 ccw(c1315,-691.61) 1415,-691.61 R30.1@1415,-653.43 ; C53.1 1227.93,119.9 1432.93,119.9 C51.1 1439.13,126.1 v1(1544.28,126.1)
  Gnd Layer w80: v1(-1350,30) -1350,-404.79 -1024.79,-730 -685,-730 ; v1(-717.5,-224.89) -749.89,-224.89 -865,-340 -865,-550 -685,-730 ; v1(-265,-555) -265,-920 ; 360.63,-1506.22 cw(c295.08,-1460.37) 340.93,-1525.93 174.9,-1359.9 -235,-950 -265,-920 ; -685,-730 -455,-730 -265,-920
  Gnd Layer w200: 360.63,-1506.22 ccw(c1.22,-0.29) 1544.48,123.67 ccw(c-62.79,-5.54) v1(1544.28,126.1)
  Bottom Layer w60: C28.1 C28.1@224.76,-1503.03 ; R25.2@720,-172.5 C31.1 835,-95.72 v1(845.72,-85)
  Bottom Layer w80: v1(845.72,-85) 974.62,43.9 1015.87,43.9 C30.1
  Bottom Layer w100: C28.1@209.91,-1502.35 ccw(c0,0) 228.1,-1499.7 ccw(c0,0) 691.83,-1350 ; C35.1@630,-1350 691.83,-1350 ; C36.1@835,-1220 901.51,-1220 ; C30.1 1034.13,62.16 1097.16,62.16 1152.84,117.84 1225.87,117.84 C50.1 C52.1 1439.13,126.1 v1(1544.28,126.1) ; C37.1@1080,-1055 1090,-1055 ; C22.1@1189.36,-941.57 cw(c0,0) 1090,-1055 ; C22.1 v1@1380,-778.03 ; 691.83,-1350 ccw(c0,0) 901.51,-1220 ; 901.51,-1220 ccw(c0,0) 1090,-1055
  other v1: 1340,-865 1290,-830 1370,-820 1325,-790 1400,-775 1355,-745
NetC21_2: C21.2 C22.2 C23.2 C24.2 C25.2 C26.2 C27.2 C28.2 C29.2 C35.2 C36.2 C37.2 R11.2 R29.2 | length 2889.4
  Top Layer w100: C23.2 223.9,-1261.1 225.52,-1267.44 ccw(c260.42,-1173.73) 271.19,-1273.15 276.1,-1272.62 ccw(c3.95,38.05) 991.82,-865.3 ccw(c917.94,-797.91) 1008.46,-840.4 1008.46,-826.1 C27.2 ; C27.2@1029.76,-821.97 1033.9,-817.84 1033.9,-813.58 1092.48,-755 1147.52,-755 1206.1,-696.42 1206.1,-681.1 1210.24,-676.97 C21.2
  Bottom Layer w60: C22.2 1244.76,-681.97 1293.31,-633.43 R29.2
  Bottom Layer w100: C28.2 214.13,-1252.84 347.1,-1252.84 406.17,-1193.77 325,-1112.6 325,-1035 ; C29.2@411.16,-1211.15 411.85,-1210.92 421.16,-1207.84 ccw(c15.6,-0.11) 962.36,-852.59 cw(c1036.57,-919.6) 969.49,-845.46 995.45,-821.97 C37.2 1019.13,-817.84 1094.13,-817.84 1211.1,-700.87 1211.1,-686.1 1215.24,-681.97 C22.2
NetC34_1: C34.1 D3.A JP2.3 JP2.4 JP2.5 JP3.9 JP3.10 JP3.11 JP3.12 JP3.13 JP3.14 JP3.15 Q1.3 R28.1 | length 2723.4
  Top Layer w60: v1(680,1260) 744.53,1260 745,1259.53 Q1.3
  Gnd Layer w60: JP2.5 30.79,720.79 80,770 80,987.47 80,1060 140,1120 396.76,1120 536.76,1260 ; 182.5,1332.5 211.41,1361.41 296.43,1361.41 309.86,1374.84 405.13,1374.84 407.14,1372.83 443.93,1372.83 546.76,1270 536.76,1260 ; v1(680,1260) 536.76,1260
  Gnd Layer w100: JP2.5 JP2.4 JP2.3
  Bottom Layer w60: v1(680,1260) 680,1185 800,1065 R28.1 800,935 772.5,907.5 C34.1 740,842.5 D3.A
  Bottom Layer w80: v1@685,1243.09 v1@685,1256.91
NetC34_2: C34.2 D3.K Q1.1 R27.1 R28.2 | length 917.6
  Top Layer w60: v1(880,1275) 886.89,1268.11 944.53,1268.11 945,1267.64 Q1.1
  Bottom Layer w60: v1(880,1275) 890,1265 R28.2 890,930 907.5,912.5 C34.2 940,842.5 D3.K 935,705 935,615 920,600 R27.1@920,560
  Bottom Layer w80: v1@885,1263.09 v1@885,1276.91
NetC38_1: C38.1 C39.1 C40.1 C41.1 C42.1 C43.1 C44.1 C45.1 C46.1 C47.2 C48.2 C49.2 R29.1 R30.2 | length 2813.1
  Top Layer w60: C48.2 C48.2@467.5,-920 ; 579.85,-926.61 586.46,-920 615,-891.46 C47.2
  Top Layer w100: C48.2@467.5,-920 586.46,-920 608.27,-920 796.1,-732.16 C43.1@810.87,-732.16 ; C43.1@819.13,-723.9 833.9,-723.9 833.9,-709.13 933.9,-609.13 1025.87,-609.13 C38.1 1034.13,-600.87 1082.4,-600.87 1215.24,-468.03 C41.1 1234.13,-463.9 1386.1,-463.9 1416.1,-433.9 1416.1,-297.16 1420.24,-293.03 C40.1
  Bottom Layer w60: C49.2 609.47,-927.5 C42.1 ; C39.1 1254.13,-443.9 1298.44,-443.9 1304.04,-438.29 ; 1302.33,-436.57 R29.1
  Bottom Layer w100: C42.1 629.76,-933.03 633.9,-928.9 633.9,-901.57 796.1,-739.37 796.1,-735.2 800.24,-731.06 C44.1 ; C44.1@816.14,-729.92 819.13,-726.93 888.01,-726.93 917.11,-697.84 935.2,-697.84 1011.1,-621.93 1011.1,-607.16 1014.39,-603.88 C45.1@1029.15,-603.88 ; C45.1@1084.37,-598.9 1215.24,-468.03 C39.1 1245.24,-468.03 1256.69,-456.57 1289.51,-423.75 1420.24,-293.03 C46.1
NetD4_A: D4.1 D7.2 | length 140
  Bottom Layer w90: D4.1 D7.2
NetD5_A: D5.1 FU1.2 | length 235.5
  Bottom Layer w100: FU1.2@-195,785 FU1.2 -105,785 -4.96,885.04 D5.1@-4.96,889.06
NetD5_K: D5.2 R27.2 U10.2 | length 1139.6
  Bottom Layer w50: 89.25,680 581.36,680 711.36,550 R27.2
  Bottom Layer w80: D5.2@49.96,640.71 99.25,690 245,690 ; 206.85,690 U10.2
NetD6_K: D6.K L2.2 U2.2 | length 1590.5
  Top Layer w60: L2.2 -216.22,-205 v1(10,-205)
  Power Layer w60: v1(196.86,213.8) 196.86,13.14 290,-80 v1(475,-80)
  Power Layer w100: v1@457.5,-80 v1(475,-80)
  Gnd Layer w60: v1(10,-205) 350,-205 v1(475,-80)
  Bottom Layer w40: v1(196.86,213.8) 196.86,211.1 208.07,199.89 U2.2
  Bottom Layer w50: v1@196.86,196.3 v1@196.86,231.3
  Bottom Layer w60: v1(475,-80) 496.42,-80 D6.K@546.42,-30
NetD7_A: D7.1 D8.2 | length 140
  Bottom Layer w90: D7.1 D8.2
NetD8_A: D8.1 D9.2 | length 135
  Bottom Layer w90: D8.1@910,236.42 D9.2
NetD10_1: D10.1 L3.2 U9.3 | length 1600.6
  Top Layer w30: U9.3@275,-320 U9.3@302.56,-320
  Top Layer w40: U9.3@275,-320 275,-230 U9.3@275,38.27
  Top Layer w70: U9.3@302.56,-320 U9.3@338.78,-283.78 ; U9.3@445,-177.56 452.6,-169.96 528.99,-169.96 570,-128.96 570,267.56 L3.2@557.56,280
  Top Layer w80: U9.3@285,-230 325,-270 338.78,-283.78 398.86,-343.86 834.72,-343.86 D10.1
NetFU1_1: FU1.1 JP2.1 JP2.2 JP3.6 JP3.7 JP3.8 | length 2168.7
  Power Layer w90: v1(-200,1060) v1(-145,1060) v1(-90,1060) -38.19,1060 -7.63,1090.56
  Power Layer w100: v1@-190,1065 -135,1120 -37.06,1120 16.81,1120 100,1120 545,1120 650,1015 650,550.65 561.63,462.28 JP2.2
  Bottom Layer w100: -170,998.58 -200,1028.58 v1(-200,1060) v1(-145,1060) v1(-90,1060) -38.19,1060 v1(-37.06,1058.87)
NetJ1_1: J1.1 U4.14 | length 180.7
  Top Layer w10: U4.14@-857.81,332.19 -795.36,269.73 -795.36,191.62 J1.1@-805.44,181.54
NetJ1_2: J1.2 U4.15 | length 163.3
  Top Layer w10: U4.15@-843.69,346.31 -760,262.62 J1.2@-760,217.66
NetJ2_1: J2.1 U4.45 | length 177.1
  Top Layer w10: J2.1 -1134.64,674.94 -1127.35,667.65 -1112.5,652.8 -1112.5,645 ; -1113.75,643.75 U4.45@-1020,550
NetJ2_2: J2.2 U4.46 | length 170.9
  Top Layer w10: J2.2@-1160.36,634.64 -1145.71,620 -1117.44,620 U4.46 U4.46@-1031.22,533.78
NetJP1_4: JP1.4 U4.11 | length 1496.8
  Top Layer w10: v1(-1046.83,37.97) -1046.83,38.17 -985,100 -985,269.73 U4.11
  Bottom Layer w35: v1(-1046.83,37.97) -1046.83,33.91 -1055,25.74 -1055,-755 -910,-900 -910,-987.9 JP1.4
  Bottom Layer w50: v1@-1046.83,20.47 v1@-1046.83,55.47
NetJP1_8: JP1.8 R5.1 U4.17 | length 2157.9
  Top Layer w10: v2(-885,480) -855.04,450.04 -855.04,413.29 U4.17
  Gnd Layer w20: v2(-885,480) -833.75,428.75 -833.75,261.25 -895,200 -895,60 v1(-805,-30)
  Bottom Layer w20: v2(-885,480) R5.1
  Bottom Layer w30: v1@-805,-39.24 -808.83,-39.24 -815,-45.41 -815,-50 -827.5,-62.5 -827.5,-680.21 -565,-942.71 -565,-1194.09 JP1.8
  Bottom Layer w50: v1@-805,-39.24 v1(-805,-30)
NetJP1_9: JP1.9 R4.1 U4.16 | length 2077.5
  Top Layer w10: U4.16@-829.8,360.2 U4.16 -704.14,234.55 -667.05,234.55 R4.1@-665,232.5
  Top Layer w20: R4.1 -555,142.5 v2(-555,20)
  Bottom Layer w30: v2(-555,20) -588.58,20 -694.18,-85.6 -777.5,-168.92 -777.5,-659.5 -475,-962 -475,-1241.88 JP1.9
  Bottom Layer w50: v2@-572.5,20 -537.5,20
NetJP2_6: JP2.6 JP3.4 R22.1 U1.6 | length 2212.1
  Top Layer w25: R22.1 -435,1430 -480,1385 -480,1220 -390,1130 -65,1130 -25.21,1169.79 JP3.4
  Top Layer w30: R22.1 -317.5,1445 -295.71,1445 -205.71,1535 U1.6 U1.6@-65,1535
  Bottom Layer w30: JP2.6 -74.77,467.84 -74.77,499.77 -125,550 -125,650 -55,720 0,720 120,840 120,1030 -25.21,1175.21 JP3.4
NetJP2_7: JP2.7 JP3.3 R22.2 U1.7 | length 1504.7
  Top Layer w25: R22.2@-200,1410 -200,1365 -242.74,1322.26 -242.74,1202.74 -215,1175 -89.85,1175 -75.21,1189.64 JP3.3
  Top Layer w30: R22.2@-182.5,1445 -182.5,1467.43 -164.93,1485 U1.7 U1.7@-60,1485
  Gnd Layer w30: -130,770 20,920 20,1090 -75.21,1185.21 JP3.3
  Gnd Layer w40: JP2.7 -165.56,465.93 -165.56,499.44 -130,535 -130,770
NetJP2_8: JP2.8 JP3.2 R24.1 | length 1223.4
  Gnd Layer w30: -305,585 -305,1065 -225,1145 -185,1145 -127.15,1202.85 -127.15,1233.59 -125.21,1235.54 JP3.2
  Gnd Layer w40: -305,585 -269.21,549.21 JP2.8
  Bottom Layer w30: R24.1 -303.18,1036.82 -303.18,1081.82 -230,1155 -145,1155 -127.15,1172.85 -127.15,1236.34 JP3.2
NetJP2_9: JP2.9 JP3.1 R20.1 | length 961.9
  Top Layer w60: v1@-380,1032.5 v1(-380,1040) v1@-380,1047.5
  Gnd Layer w30: v1(-380,1040) -380,1045.41 -380,1075 -216.72,1238.28 JP3.1
  Gnd Layer w40: v1@-380,1037.29 -380,478.23 -369.21,467.44 JP2.9
  Bottom Layer w50: R20.1 v1(-380,1040)
NetJP2_10: JP2.10 JP3.5 R10.2 | length 2096.4
  Top Layer w25: 25,1040 JP3.5@25,1238.28
  Top Layer w30: JP2.10 -469.21,470.15 -445,494.35 -445,845 -286.13,1003.87 -11.13,1003.87 25,1040
  Top Layer w50: R10.2 -875,1000 -795,1080 -767.5,1080 v1(-760,1080)
  Top Layer w60: v1(-760,1080) v1@-752.5,1080
  Power Layer w50: v1(-760,1080) -750,1080 -430,760 -430,590 -469.21,550.79 JP2.10
  Power Layer w100: v1@-777.5,1080 v1(-760,1080)
NetQ1_2: Q1.2 U10.4 | length 390.8
  Top Layer w100: U10.4 581.85,695 832.44,695 Q1.2
NetR1_2: R1.2 U1.8 | length 862.8
  Top Layer w30: U1.8@-135,1435 -65,1435 U1.8@-60,1430
  Top Layer w40: U1.8@-60,1430 5,1365 v1(560,1365)
  Top Layer w60: 495.47,1365 v1(560,1365)
  Bottom Layer w60: v1(560,1365) 582.5,1342.5 R1.2
NetR3_2: R3.2 U4.20 | length 553.1
  Top Layer w10: U4.20@-776.62,418.38 -711.66,353.42 -711.66,331.72 -718.27,325.11 v2(-718.27,318.35)
  Gnd Layer w30: v2(-718.27,318.35) -718.27,549.05 v2(-636.16,631.16)
  Bottom Layer w40: v2(-636.16,631.16) -596.16,631.16 R3.2
  Bottom Layer w50: v2@-735.77,318.35 -700.77,318.35
NetR12_1: R12.1 U5.5 | length 499.5
  Top Layer w30: v1(-175,-555) -175,-560.41 -167.2,-568.21 U5.5@-167.2,-730
  Top Layer w60: v1@-175,-562.5 v1@-175,-547.5
  Bottom Layer w30: R12.1 -197.5,-662.5 -171.17,-636.17 -171.17,-558.83 v1(-175,-555)
  Bottom Layer w80: v1@-170,-576.91 v1@-170,-563.09
NetR13_1: R13.1 U6.5 | length 557.7
  Top Layer w30: v1(-717.5,-505) -719.25,-503.25 -719.25,-464.25 -705,-450 U6.5@-705,-295
  Bottom Layer w30: v1(-717.5,-505) -600,-505 -530,-575 R13.1@-530,-664.53
  Bottom Layer w50: v1@-717.5,-522.5 v1@-717.5,-487.5
NetR14_1: R14.1 U7.5 | length 678.6
  Top Layer w30: U7.5@-1242.8,-98.13 -1242.8,-15.71 -1222.5,4.59 v1(-1222.5,10)
  Bottom Layer w30: R14.1@-1330.57,-421.93 -1378.07,-421.93 -1400,-400 -1400,-235 -1225,-60 -1225,7.5 v1(-1222.5,10)
NetR15_1: R15.1 R16.2 U4.12 | length 1621
  Top Layer w10: U4.12@-931.98,293.96 -916.99,278.97 -916.99,256.99 v2(-915,255)
  Top Layer w60: v2@-915,247.5 v2(-915,255) ; v1(-204.21,678.68) -204.21,613.64 -169.06,578.49 v1(133.49,578.49)
  Bottom Layer w10: v2(-915,255) -870,255 -720,405 -560,405 -530,435 -530,485 -485,530 -282.5,530
  Bottom Layer w35: -282.5,530 R16.2
  Bottom Layer w50: v2@-918.75,255 v2(-915,255)
  Bottom Layer w60: R16.2 -212.5,670.38 v1(-204.21,678.68) ; v1(133.49,578.49) 320.99,578.49 R15.1
NetR20_2: R20.2 U4.30 | length 619.2
  Top Layer w10: U4.30@-790.54,575.54 U4.30 -656.08,710 -600,710 v1@-542.28,767.72
  Top Layer w60: v1@-547.14,767.72 v1@-542.28,767.72 ; v1(-539.64,767.72) v1@-532.14,767.72
  Bottom Layer w40: v1(-539.64,767.72) -539.64,1035 -534.64,1040 R20.2
NetR21_2: R21.2 R24.2 U4.31 | length 790.6
  Top Layer w10: U4.31@-804.46,589.46 U4.31 -642.65,751.27 -642.65,772.35 v1(-635,780)
  Bottom Layer w25: v1(-635,780) -570.22,715.22 -429.78,715.22 -347.5,797.5 -322.5,797.5 -310,810 R21.2 R24.2@-310,935
  Bottom Layer w80: v1@-635,773.09 v1@-635,786.91
NetR25_1: R25.1 R26.2 U9.5 | length 1447.7
  Top Layer w40: v1(120,230) 120,170 141.14,148.86 U9.5
  Top Layer w60: v1@120,222.5 v1@120,237.5 ; v1@600,-257.5 v1@615,-257.5
  Power Layer w40: v1(120,230) 120,-100 277.5,-257.5 v1@607.5,-257.5
  Power Layer w100: v1@590,-257.5 v1@625,-257.5
  Bottom Layer w50: R26.2@600,-415 600,-370.12 702.42,-267.7 707.42,-267.7 R25.1 ; v1(607.5,-262.5) R25.1@707.22,-262.5
NetR31_2: R31.2 U9.2 | length 900
  Top Layer w40: v1(-70,385) 365.39,385 438.82,311.57 438.82,248.82 340,150 U9.2@340,70
  Bottom Layer w60: v1(-70,385) -50,365 0,365
PORT_B0: JP1.7 R6.1 U4.18 | length 2361.6
  Top Layer w10: v2(-891.52,578.48) -816.39,503.36 -816.39,402.47 U4.18@-751.96,338.04
  Bottom Layer w10: v2(-891.52,578.48) -925,545 -925,410 -980,355 -980,210 -885,115 -885,-75 ; R6.1 R6.1@-802.5,585
  Bottom Layer w30: -877.5,-82.5 -877.5,-700.92 -650,-928.42 -650,-1141.29 JP1.7
  Bottom Layer w40: v2(-891.52,578.48) -870,600 -837.5,600 R6.1
PORTA_11: U1.4 U4.32 | length 1782
  Top Layer w10: U4.32@-818.38,603.38 U4.32 -705,716.76 -705,774.54 -534.54,945 v1(-465,945)
  Top Layer w25: v1(35,1520) 35,1527.5 35,1570.36 49.64,1585 U1.4 U1.4@185,1585
  Top Layer w60: v1@-465,937.5 v1(-465,945) v1@-465,952.5 ; v1@35,1512.5 v1(35,1520)
  Gnd Layer w25: v1(-465,945) -465,1410 -430,1445 -110,1445 -35,1520 v1(35,1520)
  Bottom Layer w80: v1@28.09,1520 v1@41.91,1520
PORTA_12: U1.1 U4.33 | length 1708.8
  Top Layer w10: U4.33@-830,619.6 U4.33 -730,719.6 -730,784.9 -615,899.9 -615,1040 v1(-611.54,1043.46)
  Top Layer w30: U1.1@175.67,1433.2 263.2,1433.2 v1(265,1431.41)
  Top Layer w60: v1@-611.54,1035.96 v1(-611.54,1043.46) v1@-611.54,1050.96
  Bottom Layer w30: v1(-611.54,1043.46) -611.51,1082.43 -593.93,1100 -365,1100 -245,1220 -245,1270 -84.75,1430.25 263.84,1430.25 v1(265,1431.41)
PORTA_13: U4.34 | length 206.1
  Top Layer w10: U4.34@-843.72,633.72 U4.34 -764.78,712.65 ; -765,712.88 -765,801.93 v2(-761.15,805.77)
PORTB_6: JP1.6 U4.42 | length 2369
  Top Layer w10: v2(-1020,715) -1020,708.24 -1030.24,698 -1030.24,645.11 U4.42@-975.07,589.93
  Gnd Layer w20: v2(-1020,715) -1020,385 -1135,270 -1135,140 -1090,95 -979.5,95 -915,30.5 -915,-114.38 -945,-144.38 -943.24,-146.14 -943.24,-194.26 v1(-937.5,-200)
  Bottom Layer w30: v1(-937.5,-200) -941.33,-203.83 -941.33,-707.8 -730,-919.13 -730,-1083.49 JP1.6
  Bottom Layer w50: v1@-937.5,-217.5 v1@-937.5,-182.5
PORTB_7: JP1.5 U4.43 | length 2718.8
  Top Layer w10: v2(-1035,775) -1035,769.04 -1060,744.04 -1060,646.08 U4.43
  Top Layer w60: v1@-987.5,-15 v1(-980,-15) v1@-972.5,-15
  Gnd Layer w25: v2(-1035,775) -1035,772.29 -1065,742.29 -1065,620 -1275,410 -1275,-35 -1205,-105 -1020,-105 -980,-65 v1(-980,-15)
  Bottom Layer w35: v1(-980,-15) -980,-19.06 -1000,-39.06 -1000,-723.38 -825,-898.38 -825,-1040.7 JP1.5
  Bottom Layer w50: v1@-980,-36.56 v1@-980,-1.56
Vcc_3: *.3 C4.1 C6.1 C11.1 C12.1 C17.1 L1.1 R4.2 R5.2 R6.2 R23.2 U4.7 U4.24 U4.36 U4.48 | length 6166.3
  Top Layer w10: U4.48@-1108.58,556.42 -1047.17,495 -970,495 ; U4.7 -969.24,396.84 -963.61,402.47 -963.61,488.61 -970,495 ; v2(-969.98,546.41) -965.19,541.62 -965.19,499.81 -970,495 ; v2(-930,810) -930,765 U4.36@-849.53,684.53 ; -695.05,454.95 v2(-655,495)
  Top Layer w50: v1(-720,100) -647.5,100 R4.2
  Top Layer w60: v1@-1410,122.5 v1(-1410,130) v1@-1410,137.5 ; v1@-972.5,1105 v1(-965,1105) v1@-957.5,1105 ; v1@-727.5,100 v1(-720,100) ; v1@-472,302.5 v1(-472,310) v1@-472,317.5 ; v1@-412.5,-450 v1(-405,-450) v1@-397.5,-450
  Power Layer w10: v2@-657.5,495 v2(-655,495)
  Power Layer w40: -930,767.5 v2@-657.5,495
  Power Layer w50: v1(-965,1105) -930,1070 v2(-930,810) -930,767.5 -930,665 -1075,520 -1365,520 -1450,435 -1450,170 v1(-1410,130) -1445,95 -1445,-50 -1400,-95 -945,-95 -890,-40 -890,25 -815,100 v1(-720,100) -295,100
  Power Layer w80: v1(-472,310) -472,277 -313.75,118.75 -295,100 v1(-180,-15) -180,-75 -405,-300 v1(-405,-450)
  Power Layer w100: v1@-982.5,1105 v1(-965,1105)
  Bottom Layer w40: R5.2@-972.5,485 -972.5,502.5 -969.98,505.02 v2(-969.98,546.41) -969.98,602.52 -967.5,605 R6.2@-965.23,607.27
  Bottom Layer w50: R23.2 v1(-1410,130) ; v1@-982.5,1105 v1(-965,1105) -902.5,1105 L1.1 ; R5.2 R5.2@-972.5,485 ; R6.2@-965.23,607.27 -962.97,609.53 -961.72,609.53 -961.25,610 -961.25,723.75 -930,755 v2(-930,810) ; v1@-722.5,100 v1(-720,100) C6.1@-687.5,100 ; C6.1 C12.1 -547.5,345 -532.5,345 C17.1 -522.5,345 -507,345 v1(-472,310)
  Bottom Layer w60: v1(-180,-15) -160.08,-15 -104.45,-70.63 *.3
  Bottom Layer w80: C4.1@-440,-318.03 -436.25,-318.03 -422.12,-332.16 -422.12,-432.88 v1(-405,-450)
Vcc_5: *.1 C1.1 C2.1 C5.1 C14.1 C15.1 JP1.1 L2.1 U1.3 U2.4 | length 6849.2
  Top Layer w30: U1.3@115,1535 U1.3 403.04,1535
  Top Layer w60: v1(403.04,1456.96) 403.04,1535
  Top Layer w80: L2.1 -192.68,243.9 v1(-85,243.9)
  Power Layer w40: v1(-400.82,1364.18) 29.18,1364.18 190,1525 357.5,1525 401.13,1481.37 401.13,1461.58 402.48,1460.22 v1@406.31,1460.22 ; 400,1400 785,1015 785,510 555,280 ; v1@401.13,1447.97 401.13,1455.05 v1(403.04,1456.96) ; v1@414.29,1468.21 v1@425,1457.5
  Power Layer w80: JP1.1 -1120.49,-785 -274.79,-785 -85,-595.21 v1(-85,243.9) 31.1,360 260,360 340,280 v1(373.82,280) 555,280
  Power Layer w100: 425,1422.5 v1@425,1457.5
  Bottom Layer w30: C2.1 399.21,1535.79 399.21,1460.79 v1(403.04,1456.96)
  Bottom Layer w40: U2.4 341.93,247.32 v1@371.91,277.29 ; v1(373.82,280) 440,280 445,285 C15.1
  Bottom Layer w60: C1.1 -530.87,1464.13 -415.87,1464.13 C5.1@-400.82,1479.18 ; v1(-400.82,1364.18) C5.1@-400.82,1479.18 ; C5.1 C5.1@-400.82,1479.18
  Bottom Layer w80: *.1@-285.55,-145 *.1 -285.55,54.24 -238.69,101.1 -176.1,101.1 -161.97,115.24 C14.1 ; C14.1@-147.84,158.9 -131.86,158.9 -85,205.76 v1(-85,243.9)
pads on no net: U1.5 U4.1 U4.2 U4.3 U4.4 U4.10 U4.19 U4.29 U4.37 U4.38 U4.39 U4.40 U4.41 U5.6 U6.6 U7.6

## Polygon pours and split planes (outlines as drawn)
GND on Bottom Layer "GND_L04_P003" (solid, remove dead copper, pour order 3): -1788.68,1744.68 1821.32,1744.68 1818.68,-1719.68 -1788.68,-1720.32
Vcc_5 on Power Layer "VCC_5_L02_P001" (solid, remove dead copper, pour order 1): -1850,1550 -1850,1740 1760,1740 1760,-1510 1760,-1725 -1850,-1725 -1850,-310 -1850,465 -1850,865
GND on Gnd Layer "GND_L03_P000" (solid, remove dead copper, pour order 0): -1855.43,1325 -1855.43,1725 1754.57,1725 1754.57,-1740 -1070,-1740 -1855.43,-1740 -1855.43,-1595 -1855.43,-1270
GND on Top Layer "GND_L01_P002" (solid, remove dead copper, pour order 2): -1842.5,1730.12 1767.5,1730.12 1764.85,-1734.21 1117.5,-1735 -1077.5,-1735 -1842.5,-1735

## Keep-outs
Keep-Out Layer:
  circle w10: c1.22,-0.29 r1673.23

## Other copper
Top Layer:
  pour cut-out: 440,210 475,175 520,175 520,-50 530,-60 470,-120 310,-120 300,-110 300,165 390,165 430,205
  pour cut-out: -830,615 -629.32,422.5 -656.82,395 -665.91,385.91 -725,330 -805.57,408.97 -919.99,521.11
Power Layer:
  rectangle net NetFU1_1: 55,1070 205,1255
Gnd Layer:
  rectangle net NetC34_1: -200,1265 205,1355
  rectangle net GND: 260,-775 395,-645
Bottom Layer:
  rectangle net GND: 260,-775 395,-645
  pour cut-out: 635,1570 790,1490 790,1440 635,1285 440,1480 440,1490 530,1580

## Silkscreen, mask and mechanical layers (free items; w line width, h text height)
Mechanical 13:
  circle w5: c-1.01,-1497.02 r118.11
  circle w5: c1294.62,747.08 r118.11
  circle w5: c-1296.64,747.08 r118.11